# Altium PCB Main_Board.PcbDoc (part 1 of 14)
Units mm, origin at the board's own origin, x right, y up, seen from the top; angles counter-clockwise.
Board outline 142 x 82 mm, 10 copper layers (L1_Top, L2_PWR1, L3_Sig1, L4_GND1, L5_Sig2, L6_Sig3, L7_GND2, L8_Sig4, L9_GND3, L8_Bottom), stack 1.71 mm thick; 299 components, 328 nets, 2329 pads, 2908 vias.
Unrouted connection lines stored in the file: 2.
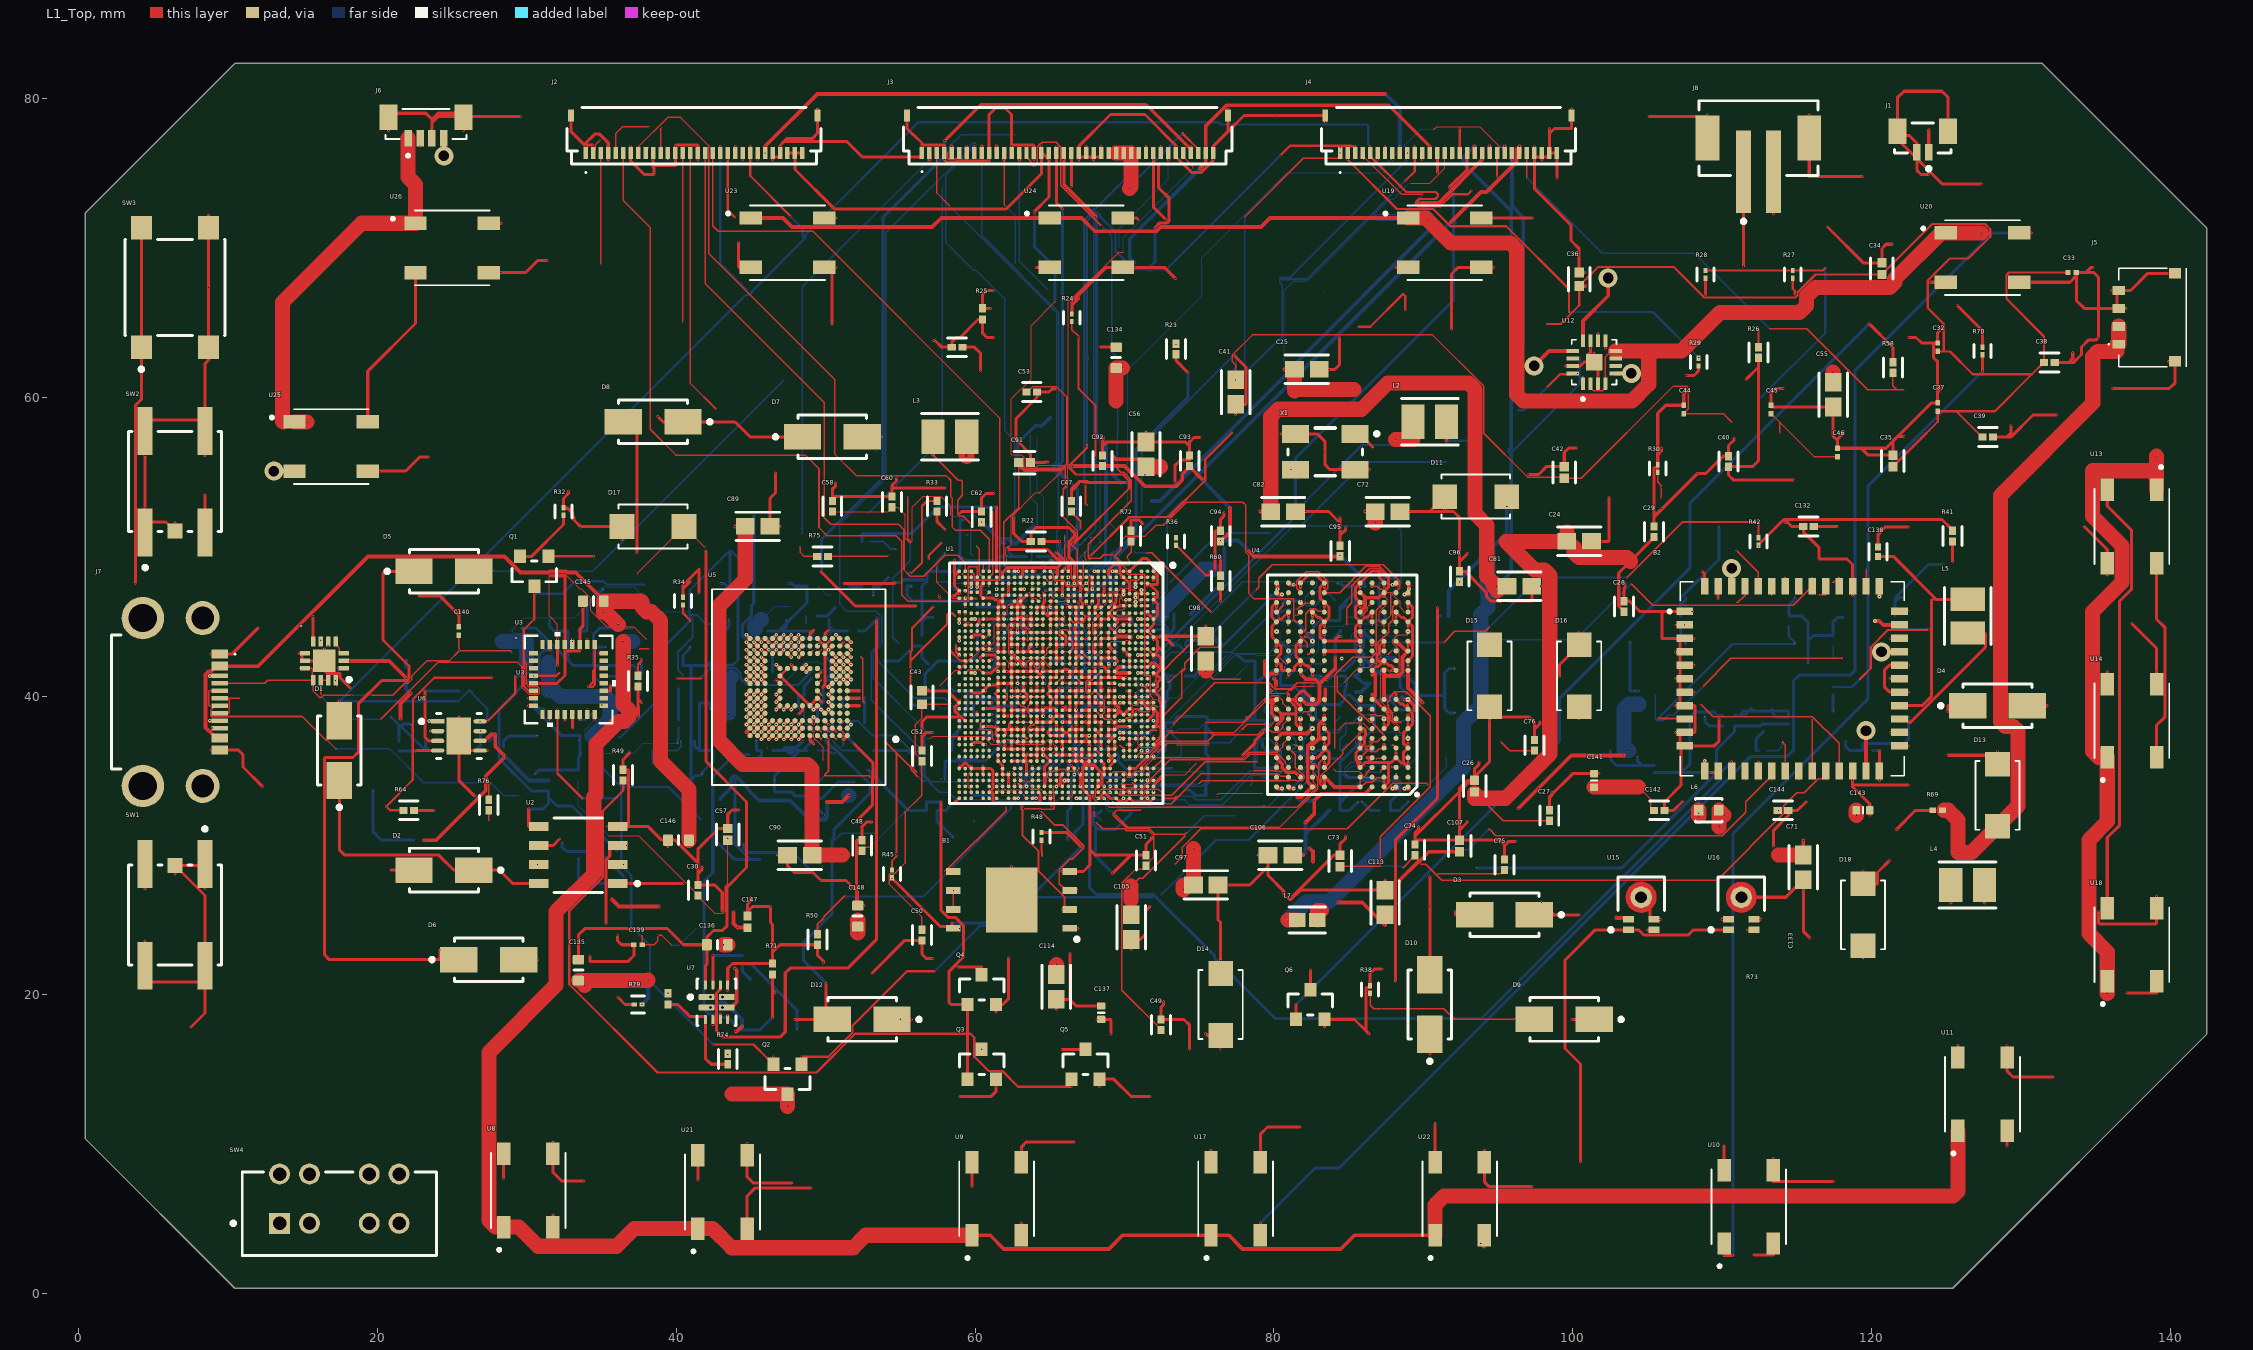
[diagram p0: L1_Top view]
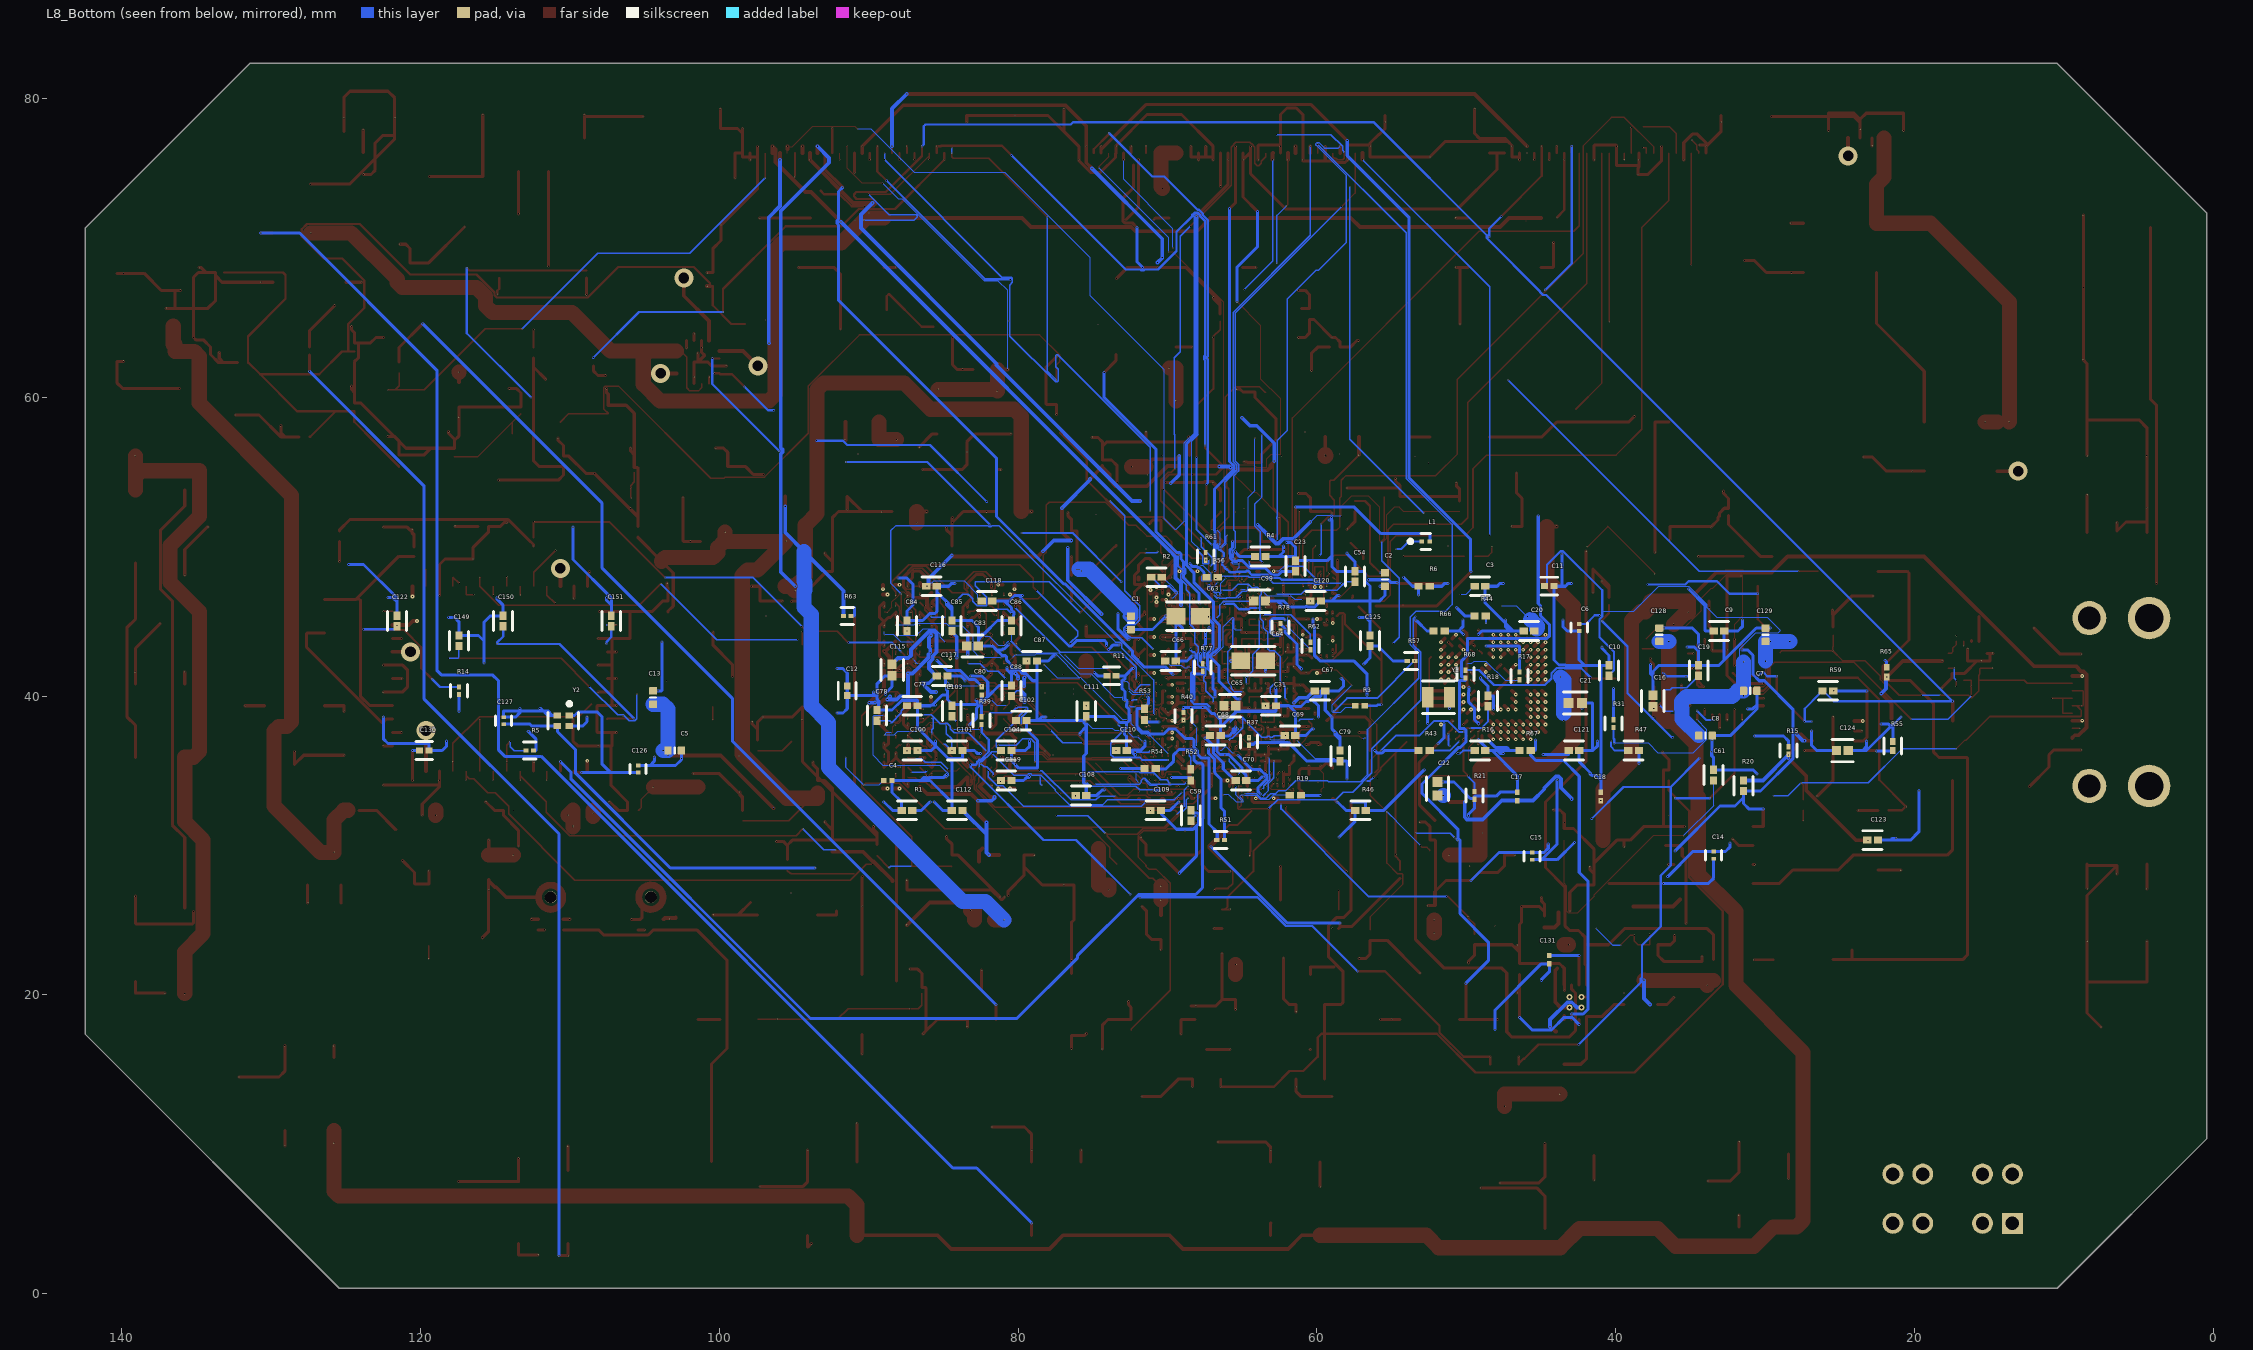
[diagram p1: L8_Bottom view, seen from below]
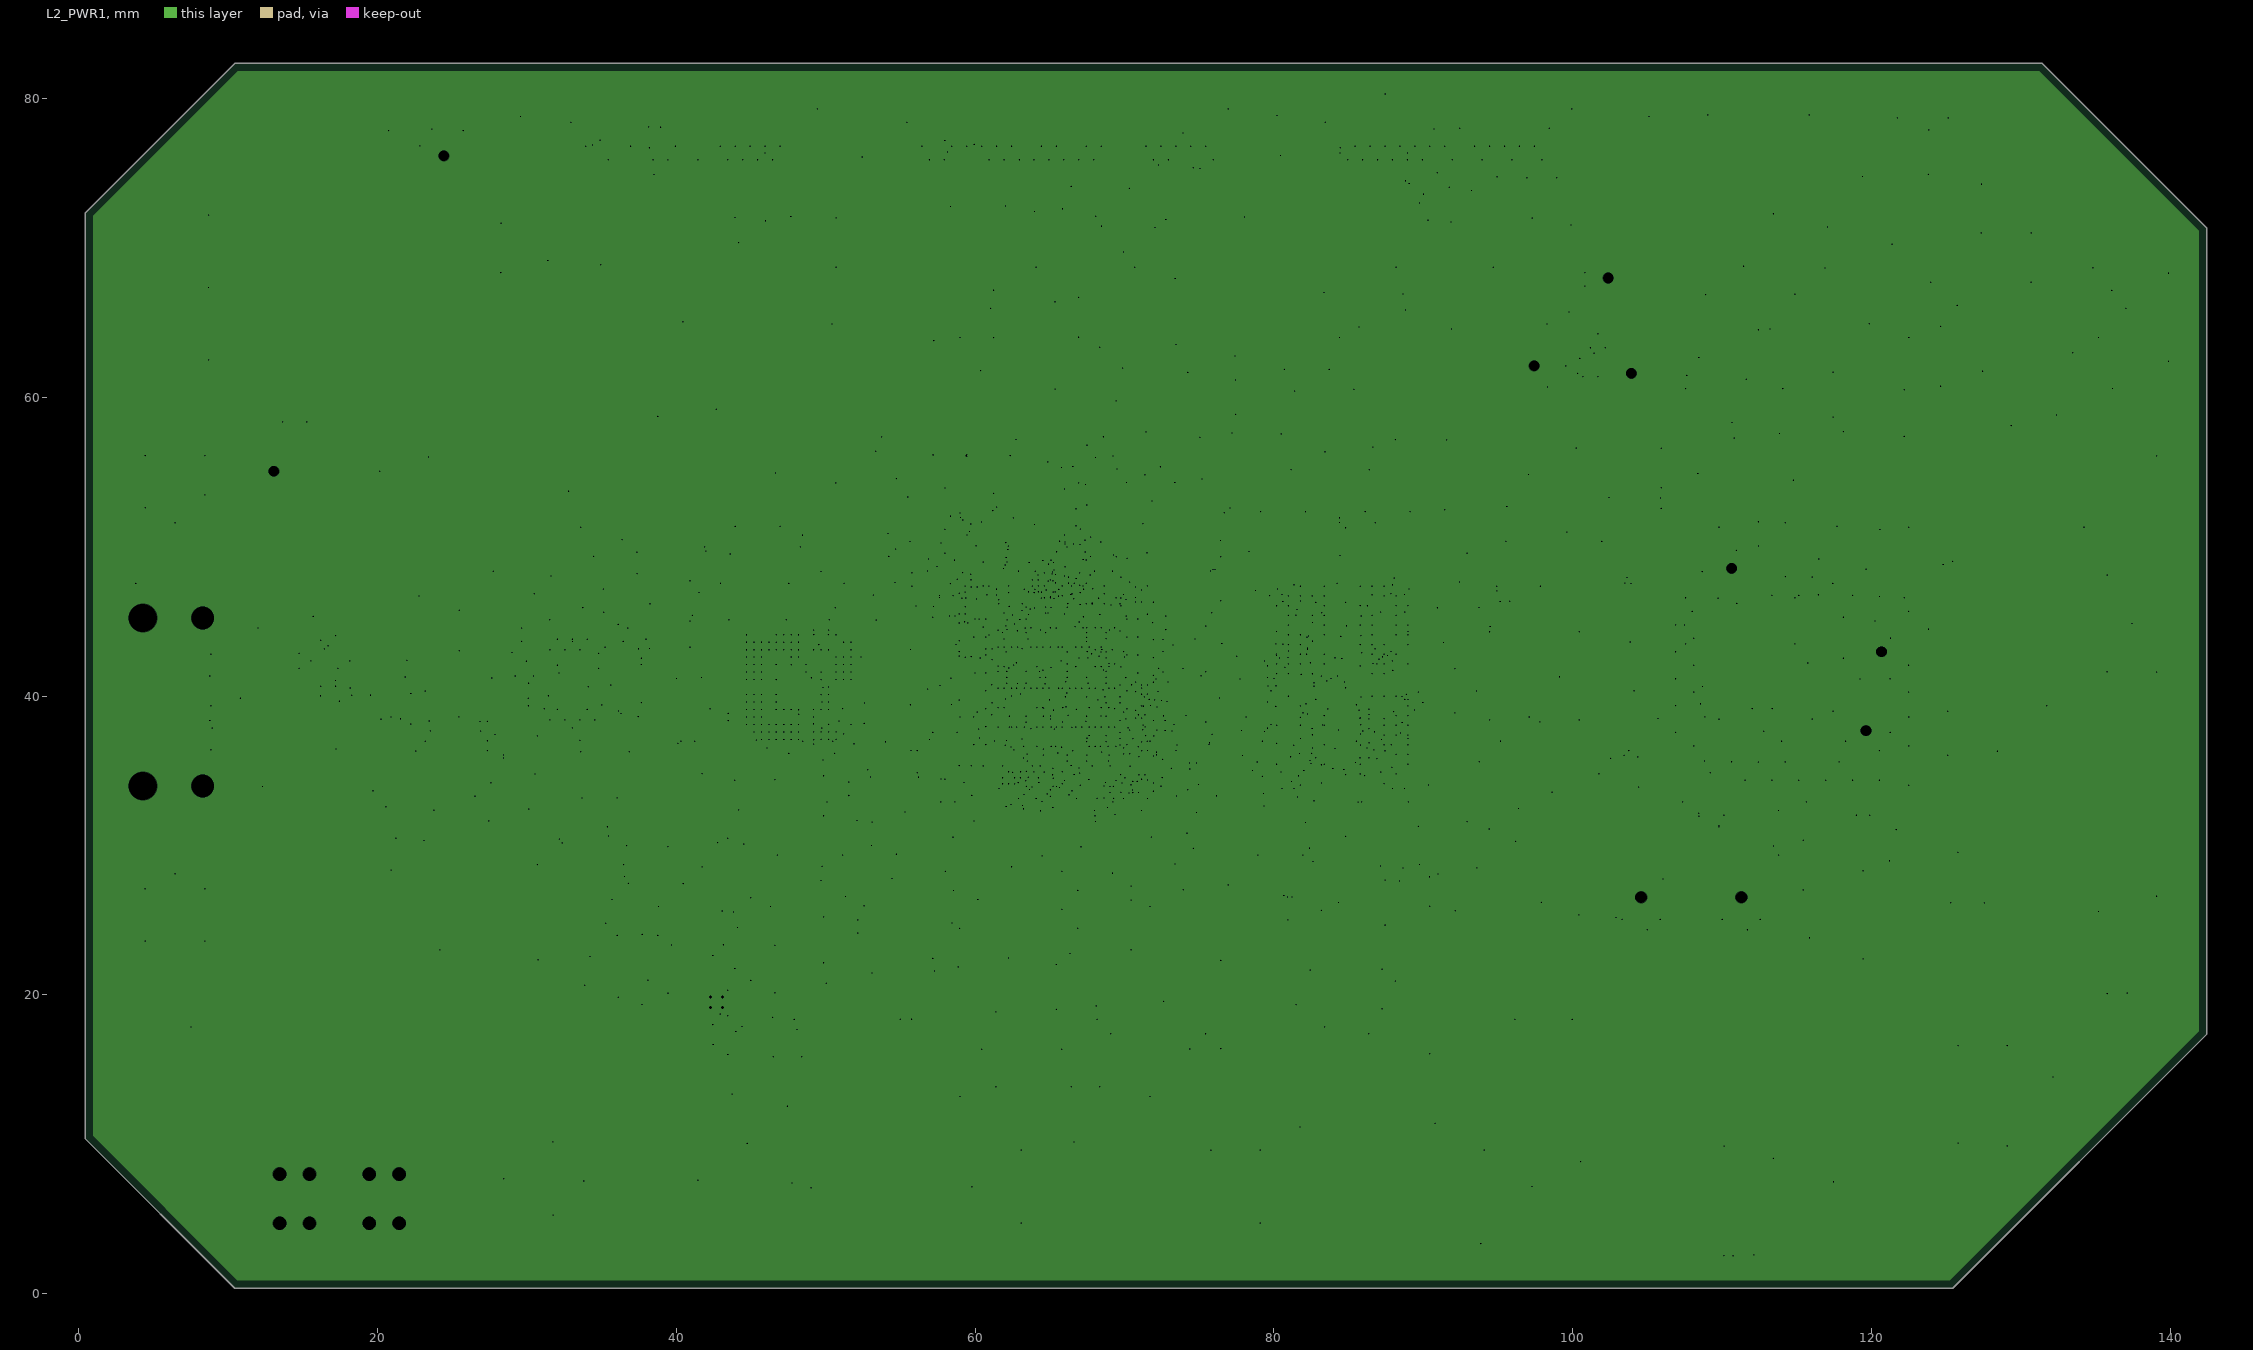
[diagram p2: L2_PWR1, clearances drawn from the general rule]
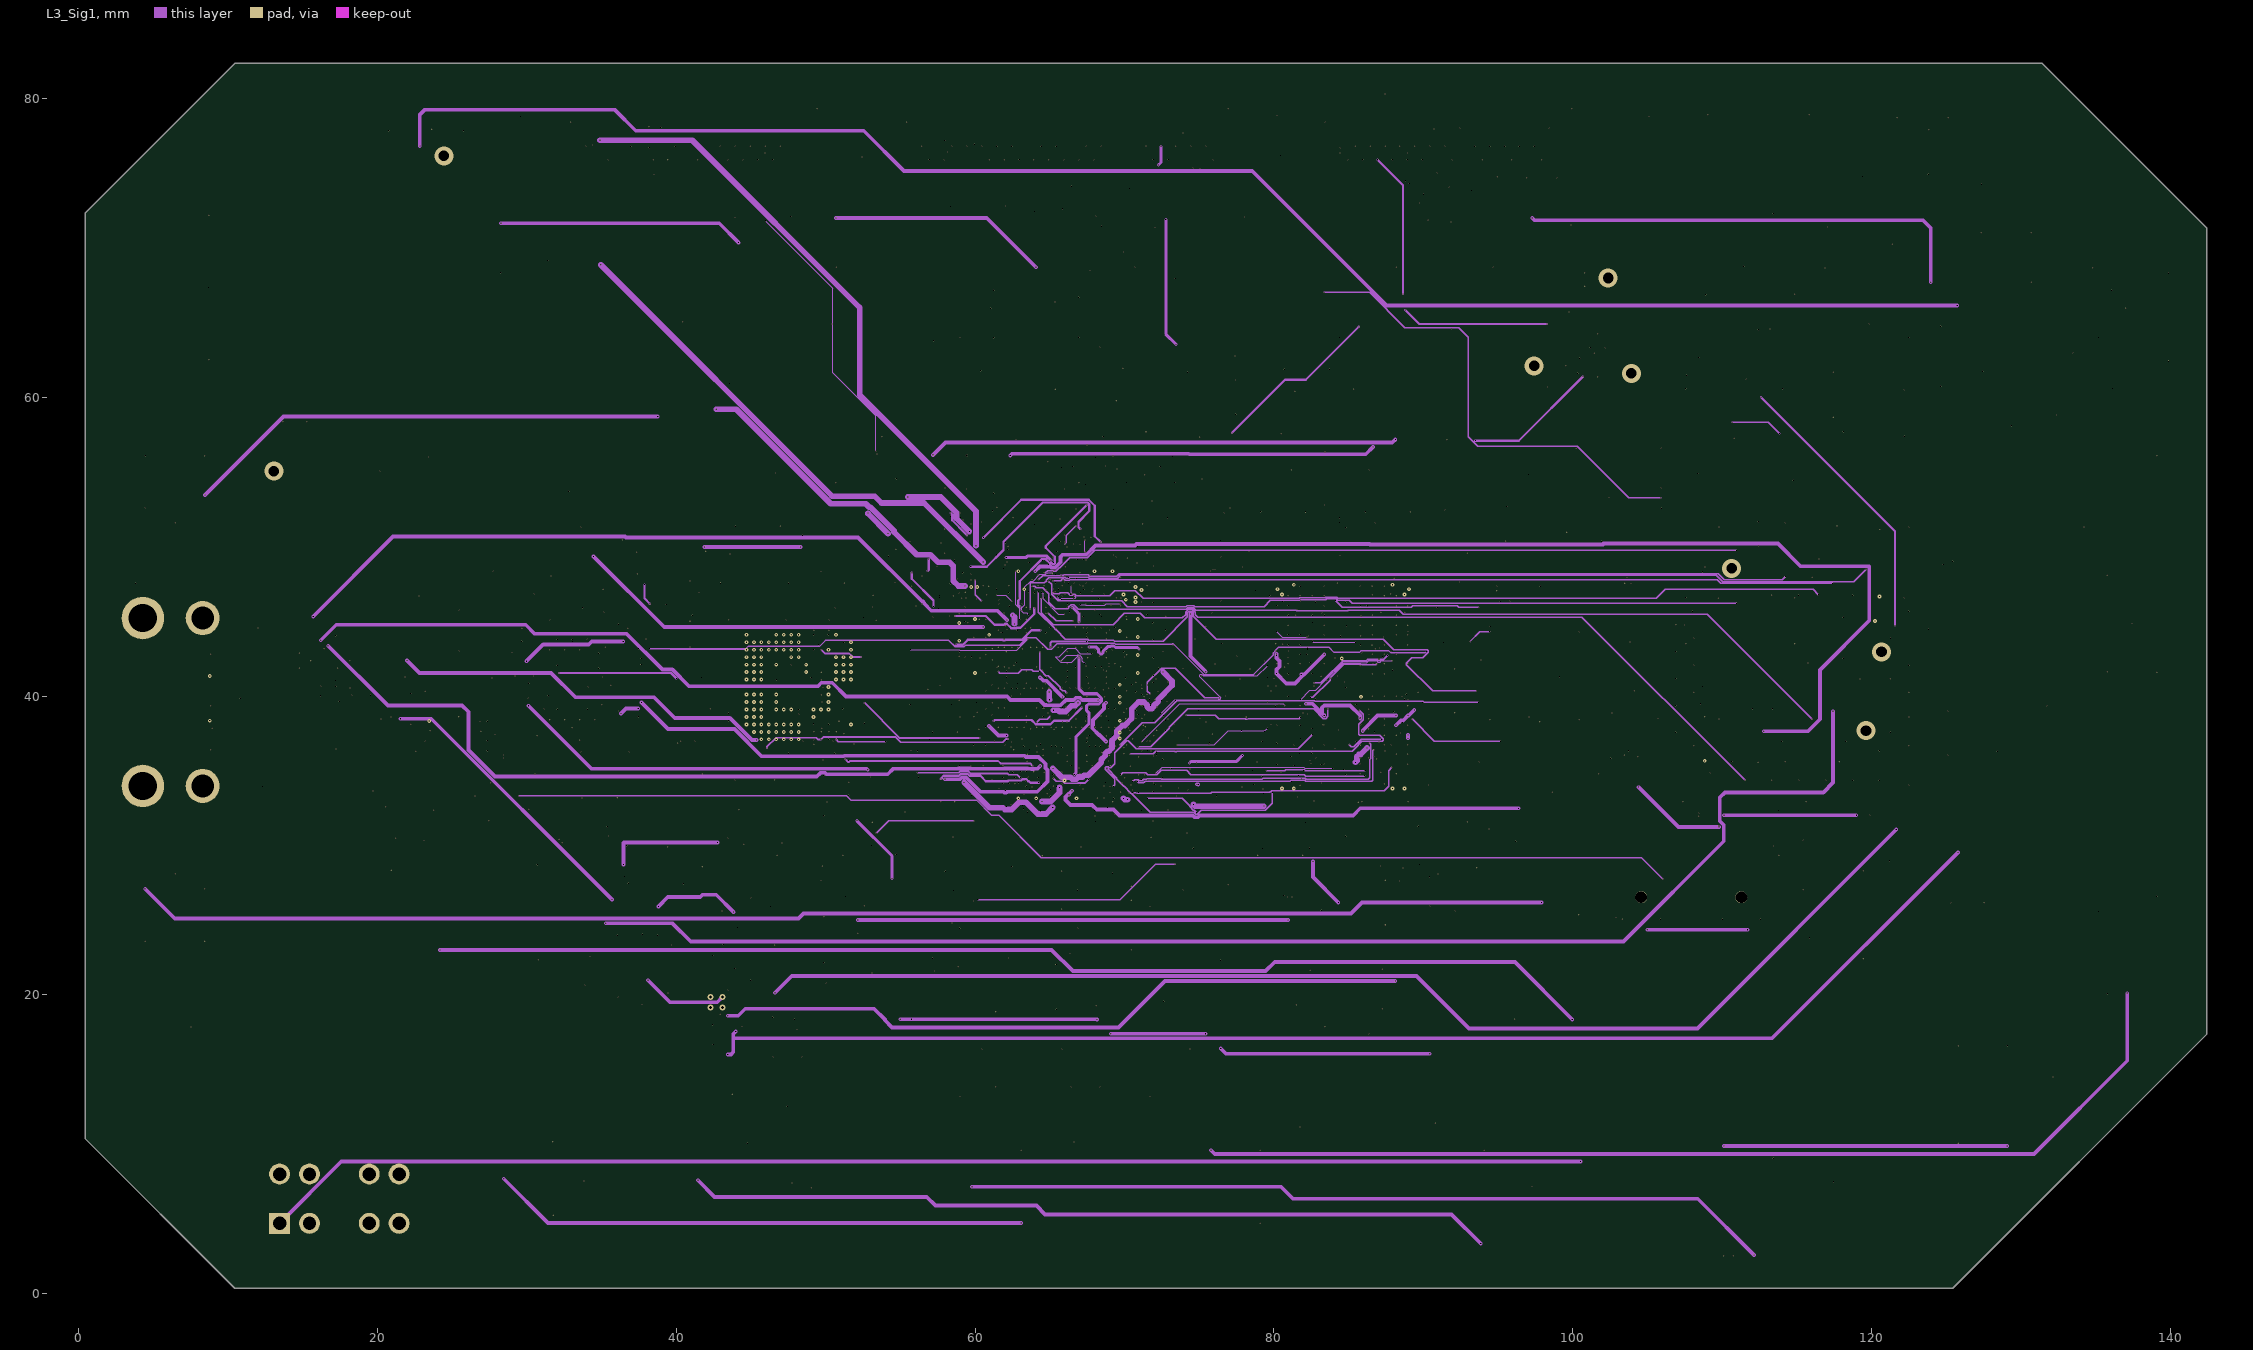
[diagram p3: L3_Sig1]
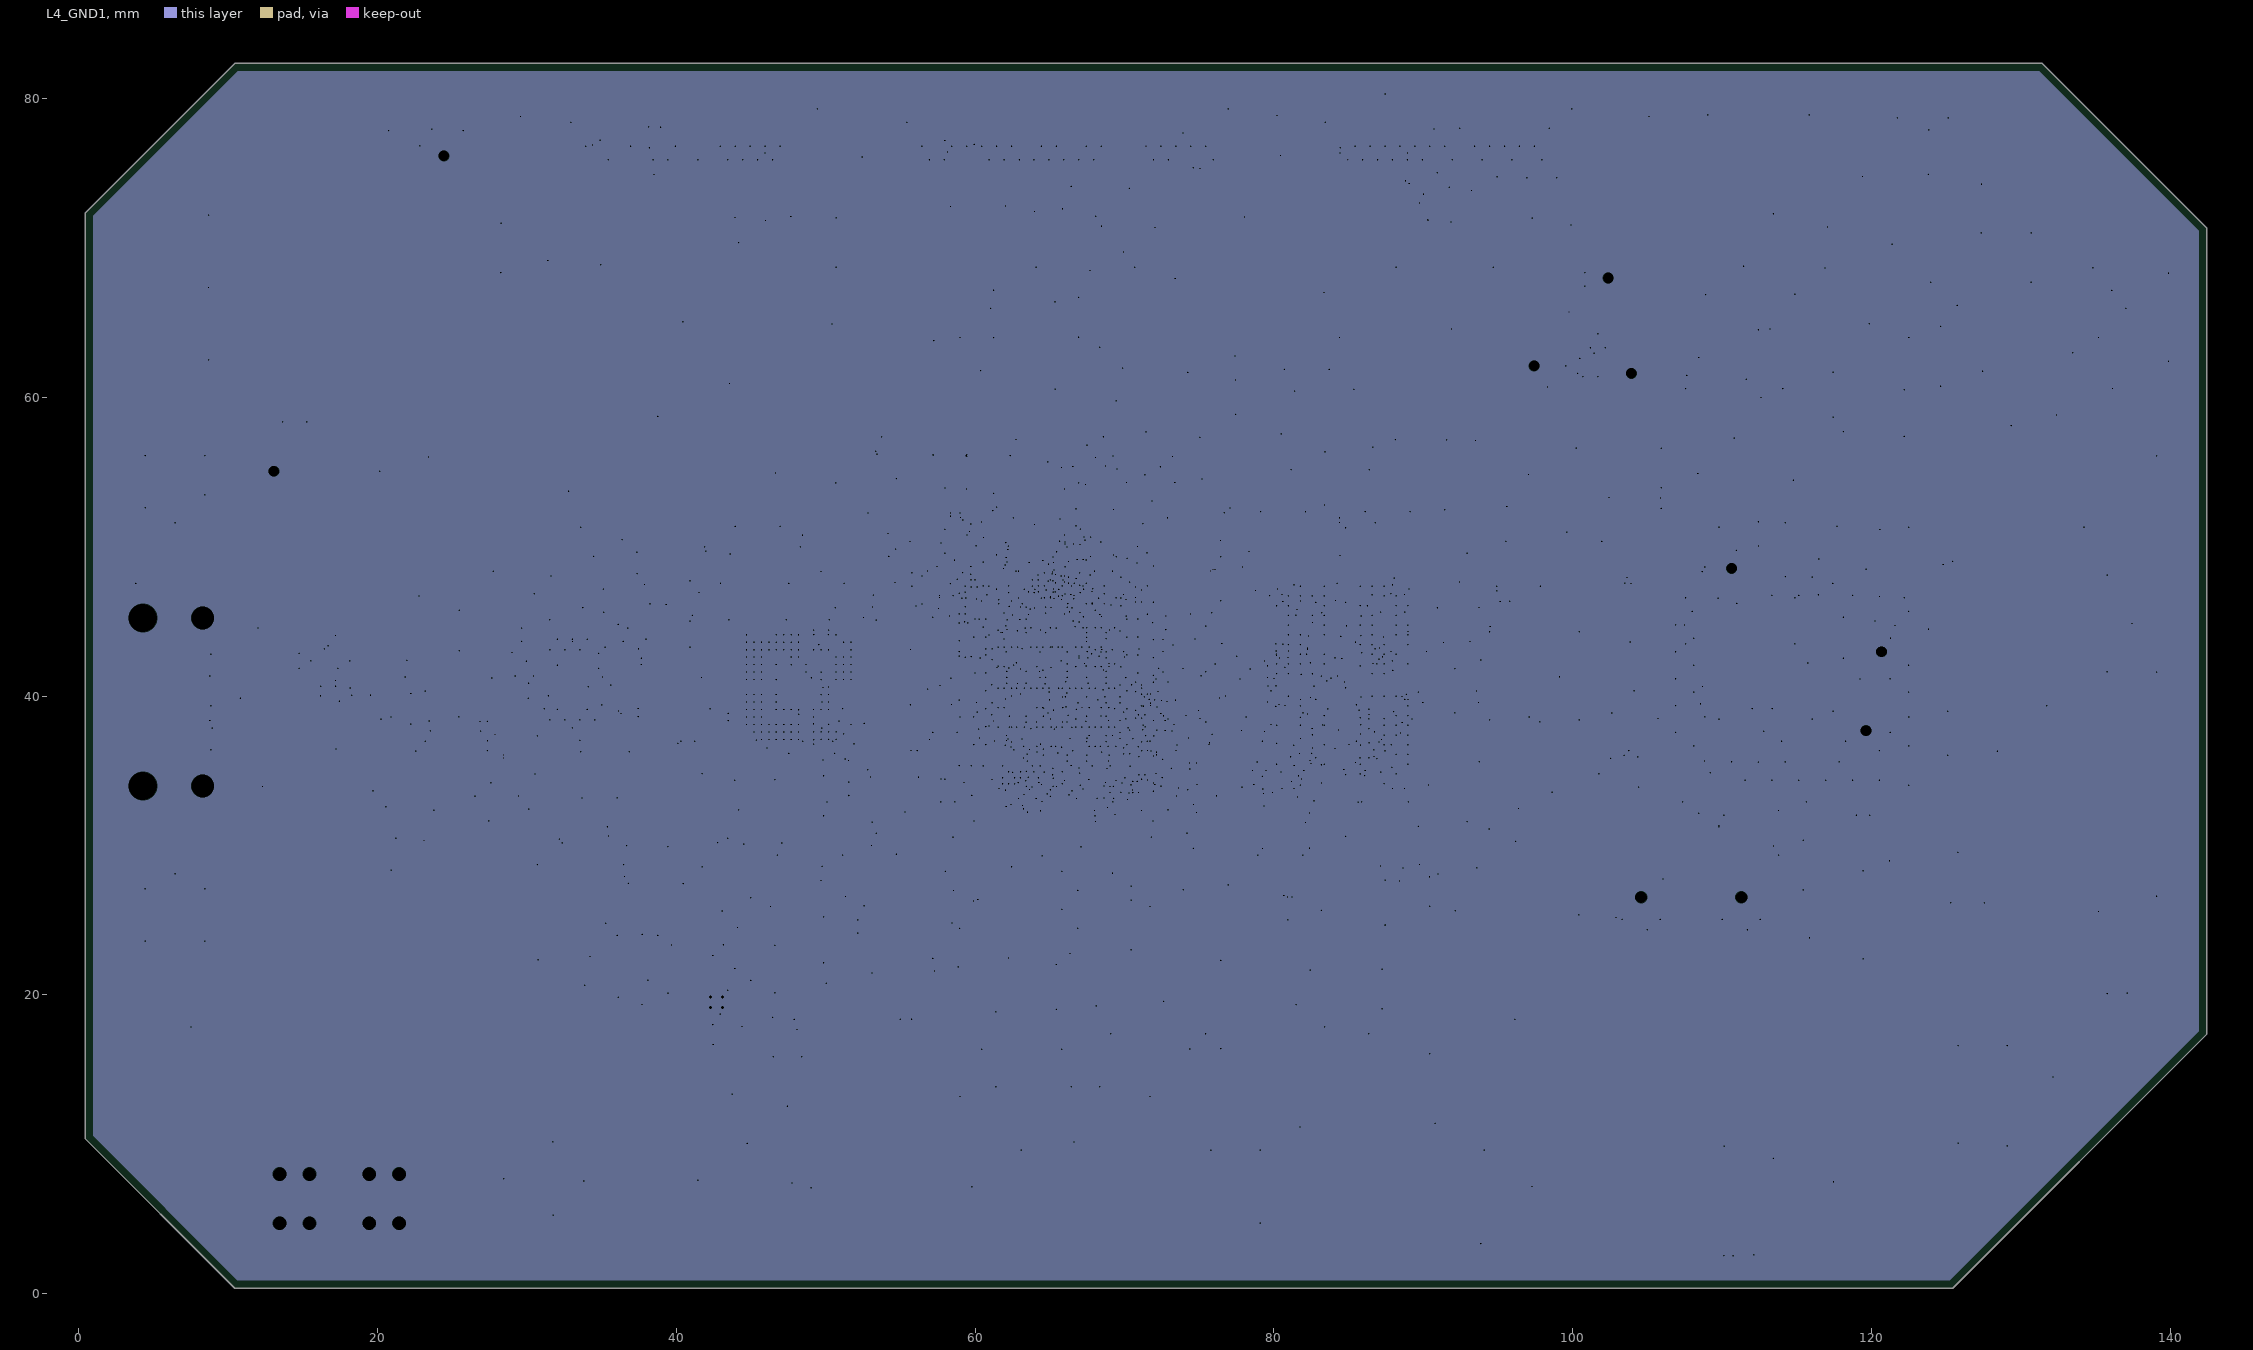
[diagram p4: L4_GND1, clearances drawn from the general rule]
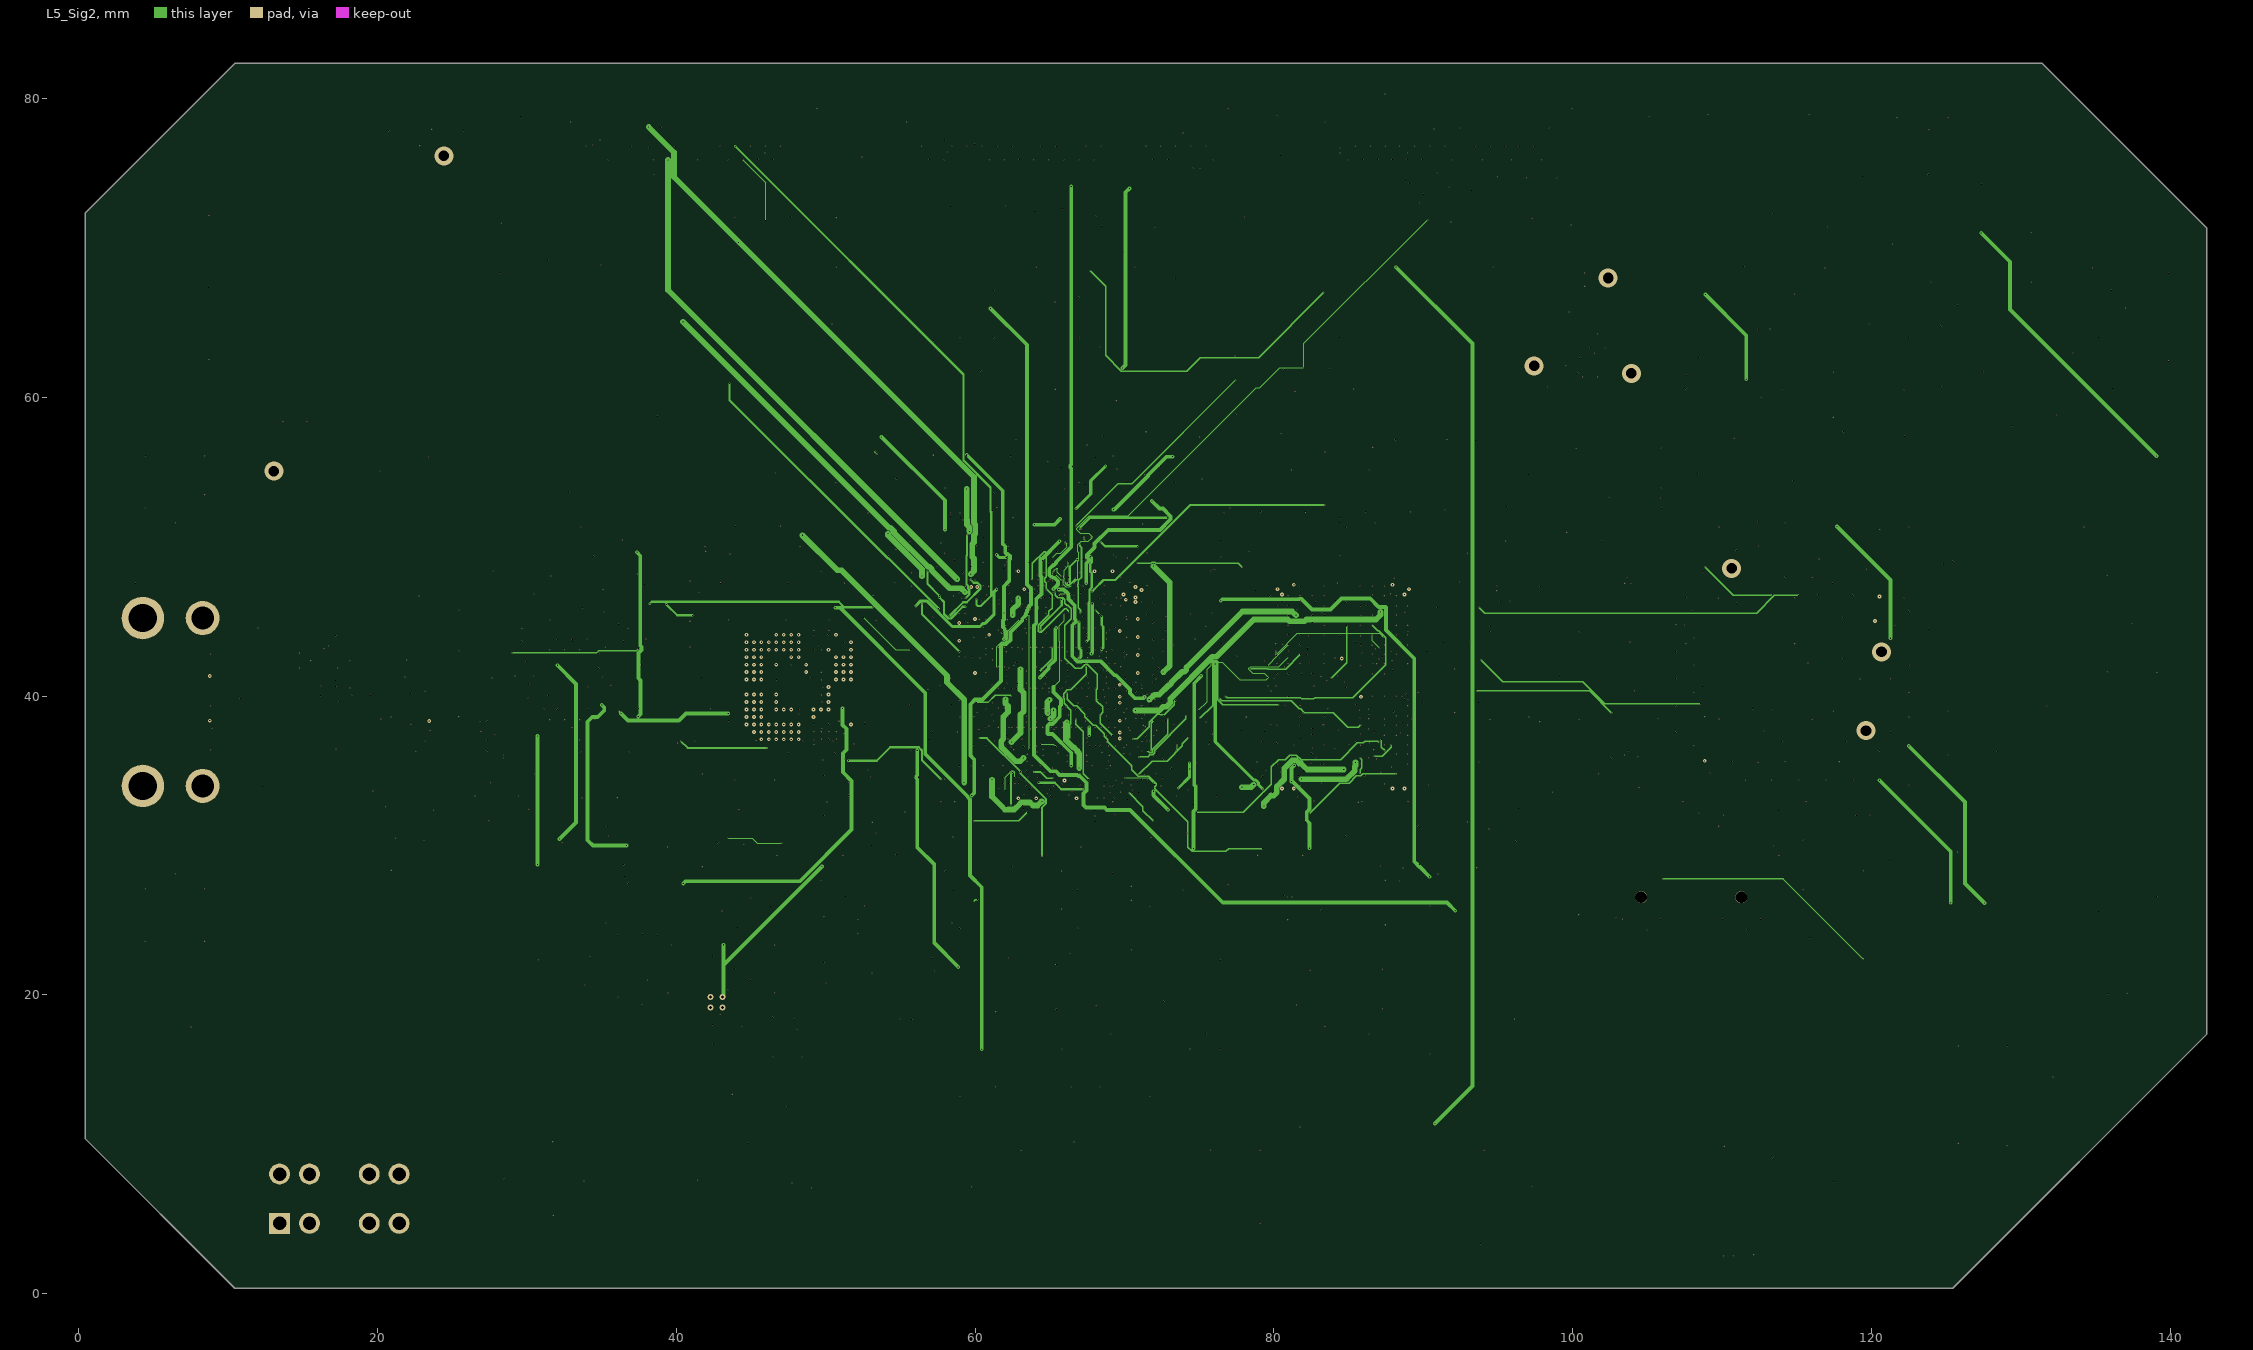
[diagram p5: L5_Sig2]
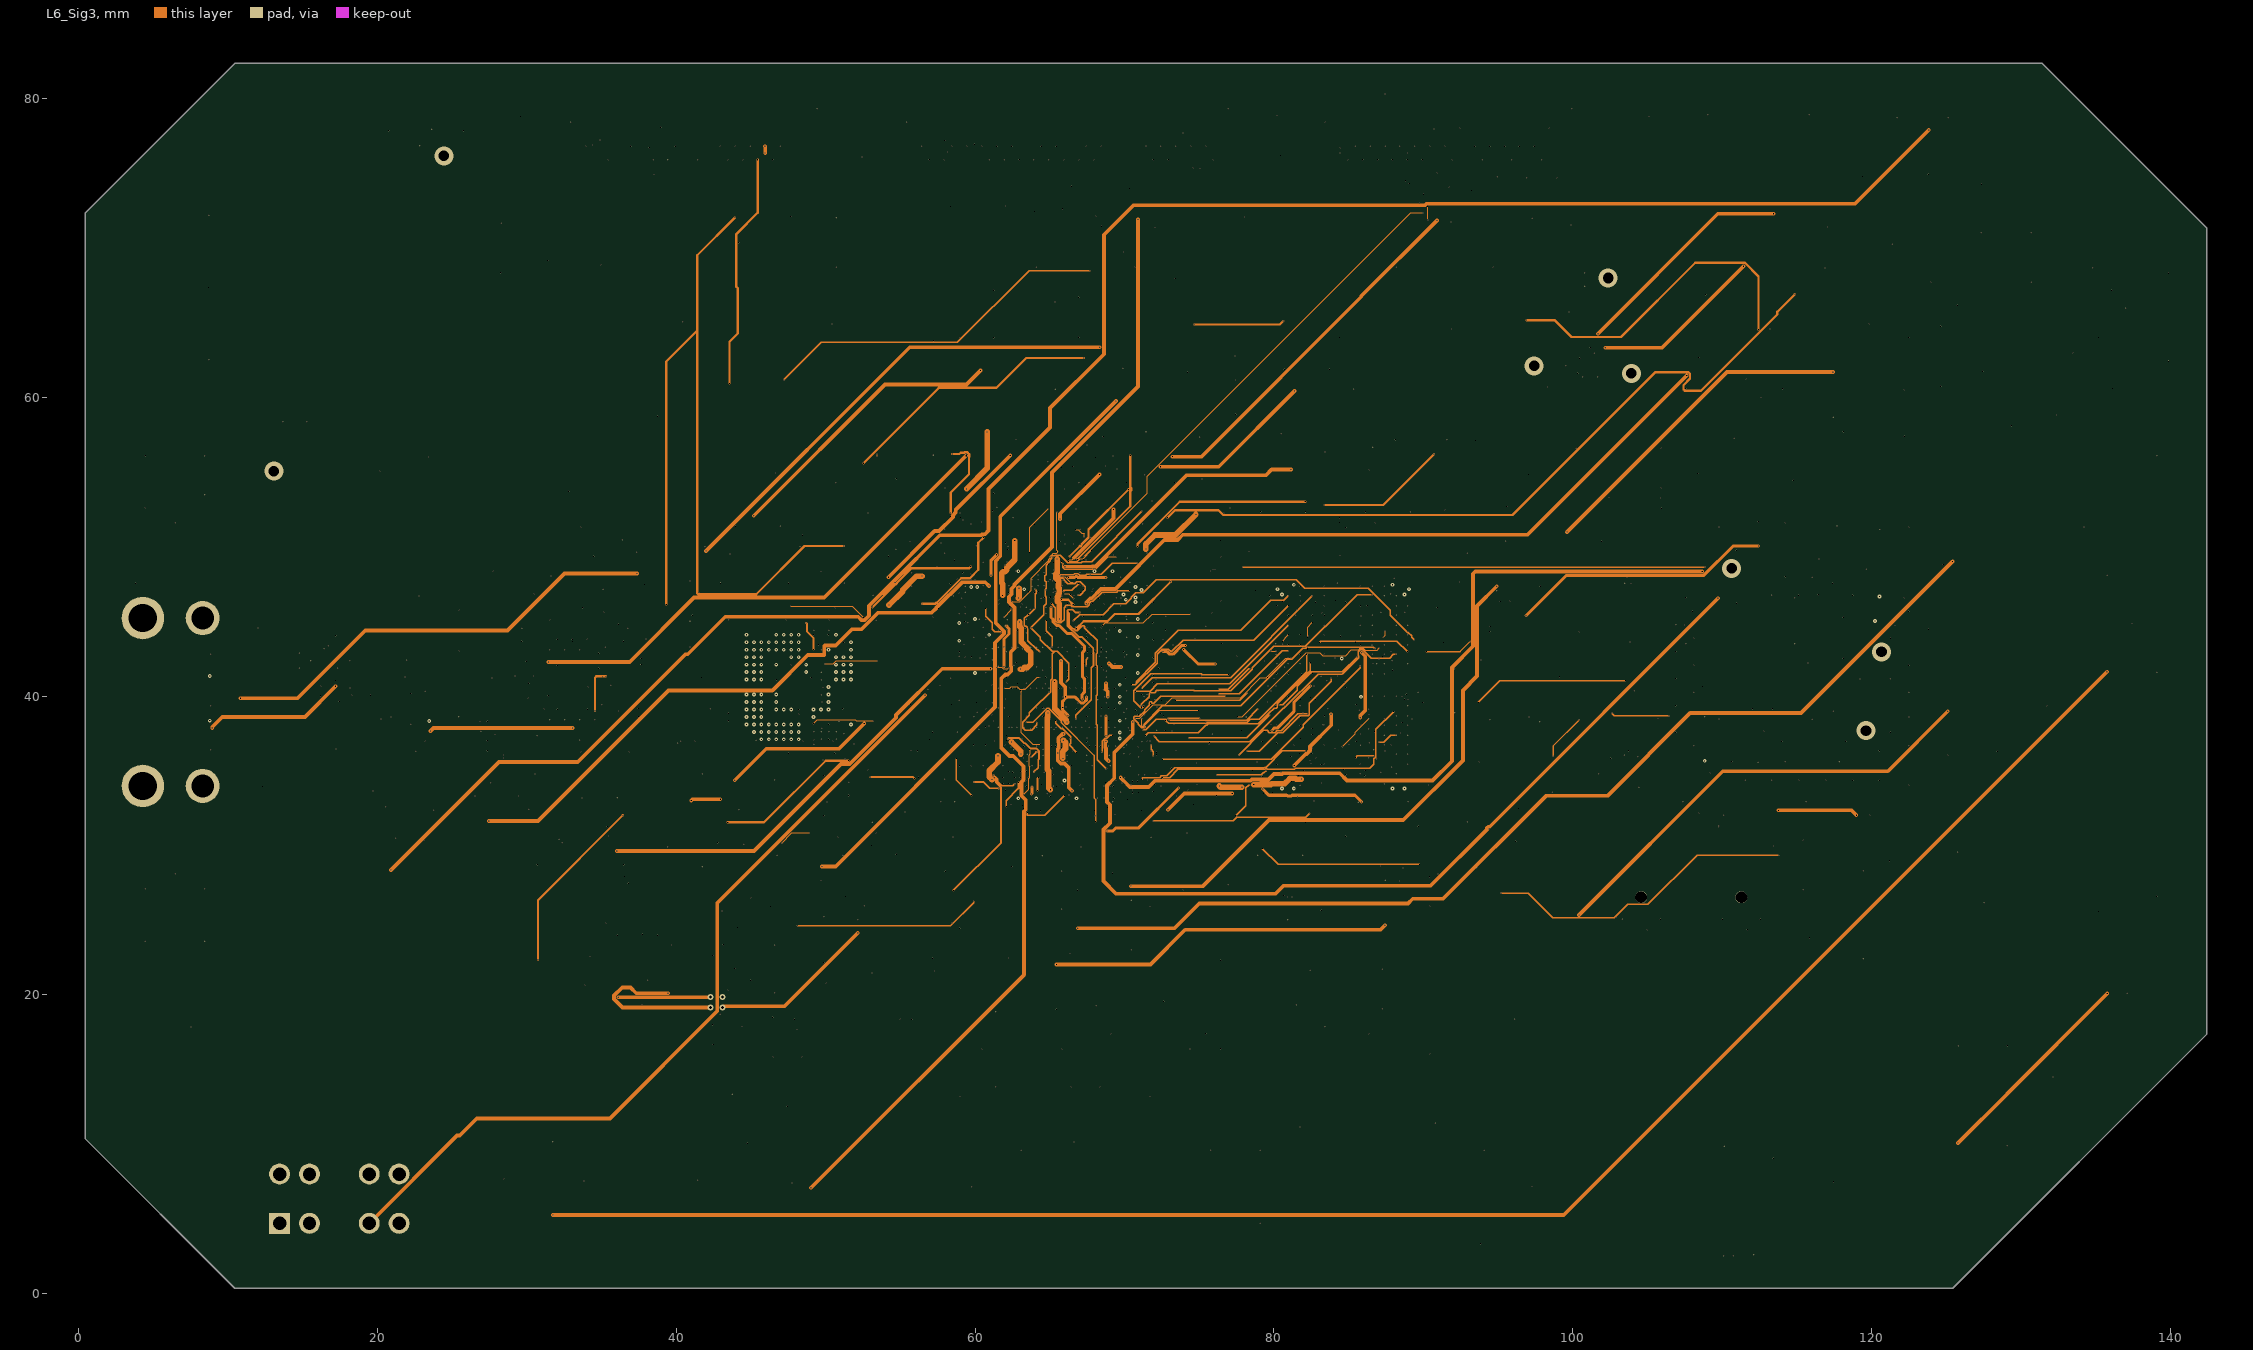
[diagram p6: L6_Sig3]
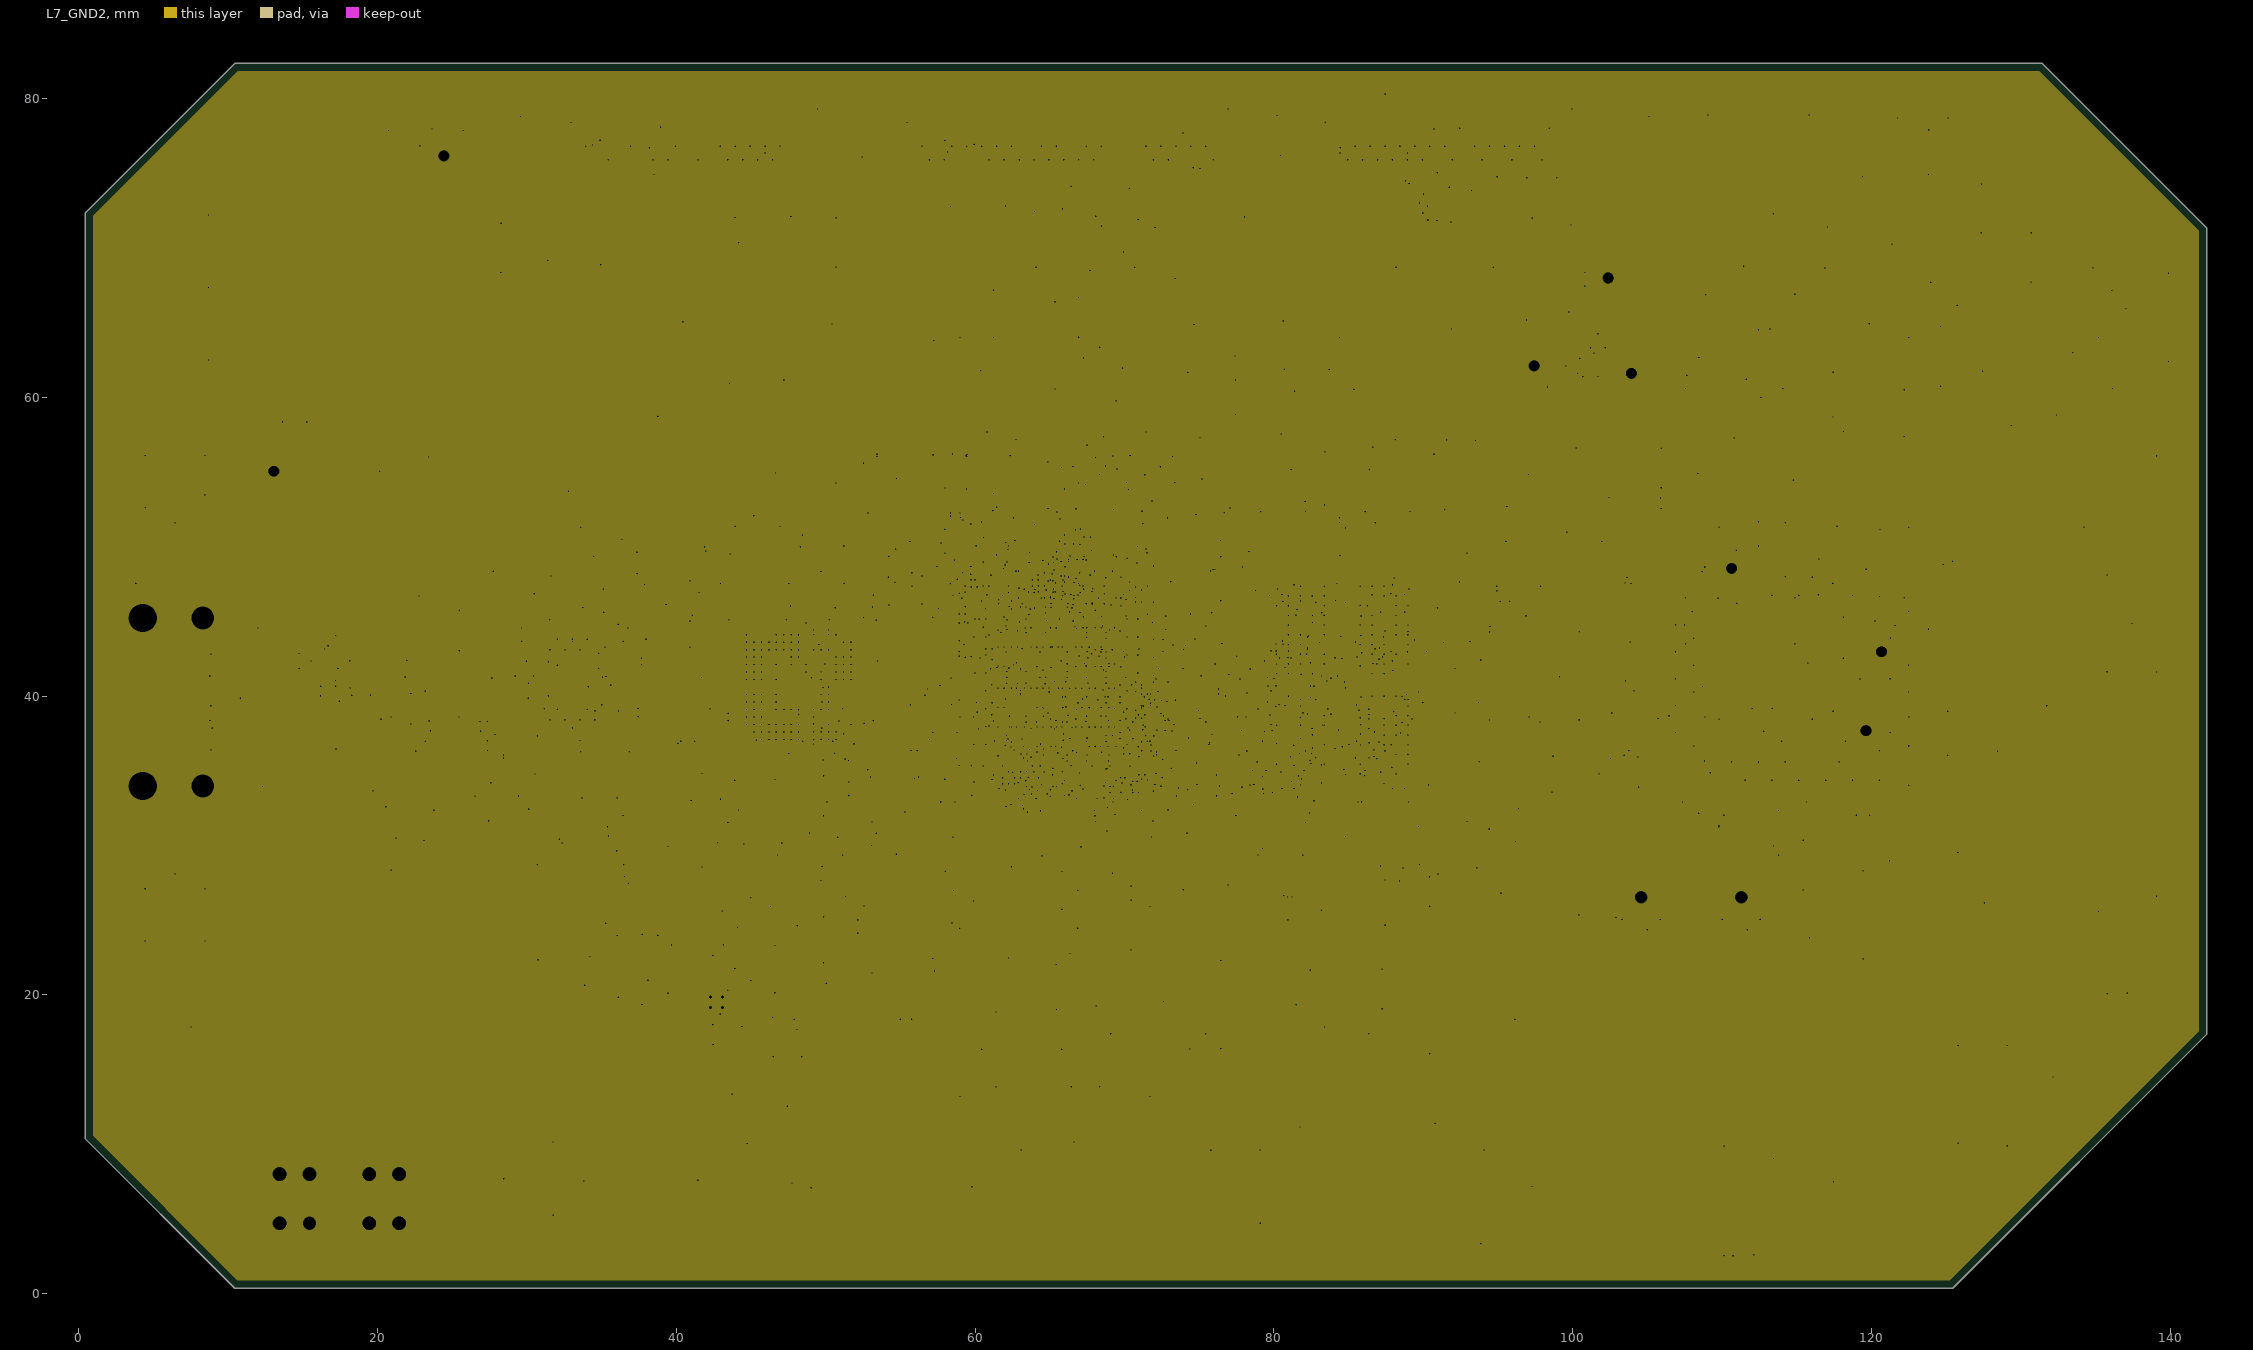
[diagram p7: L7_GND2, clearances drawn from the general rule]
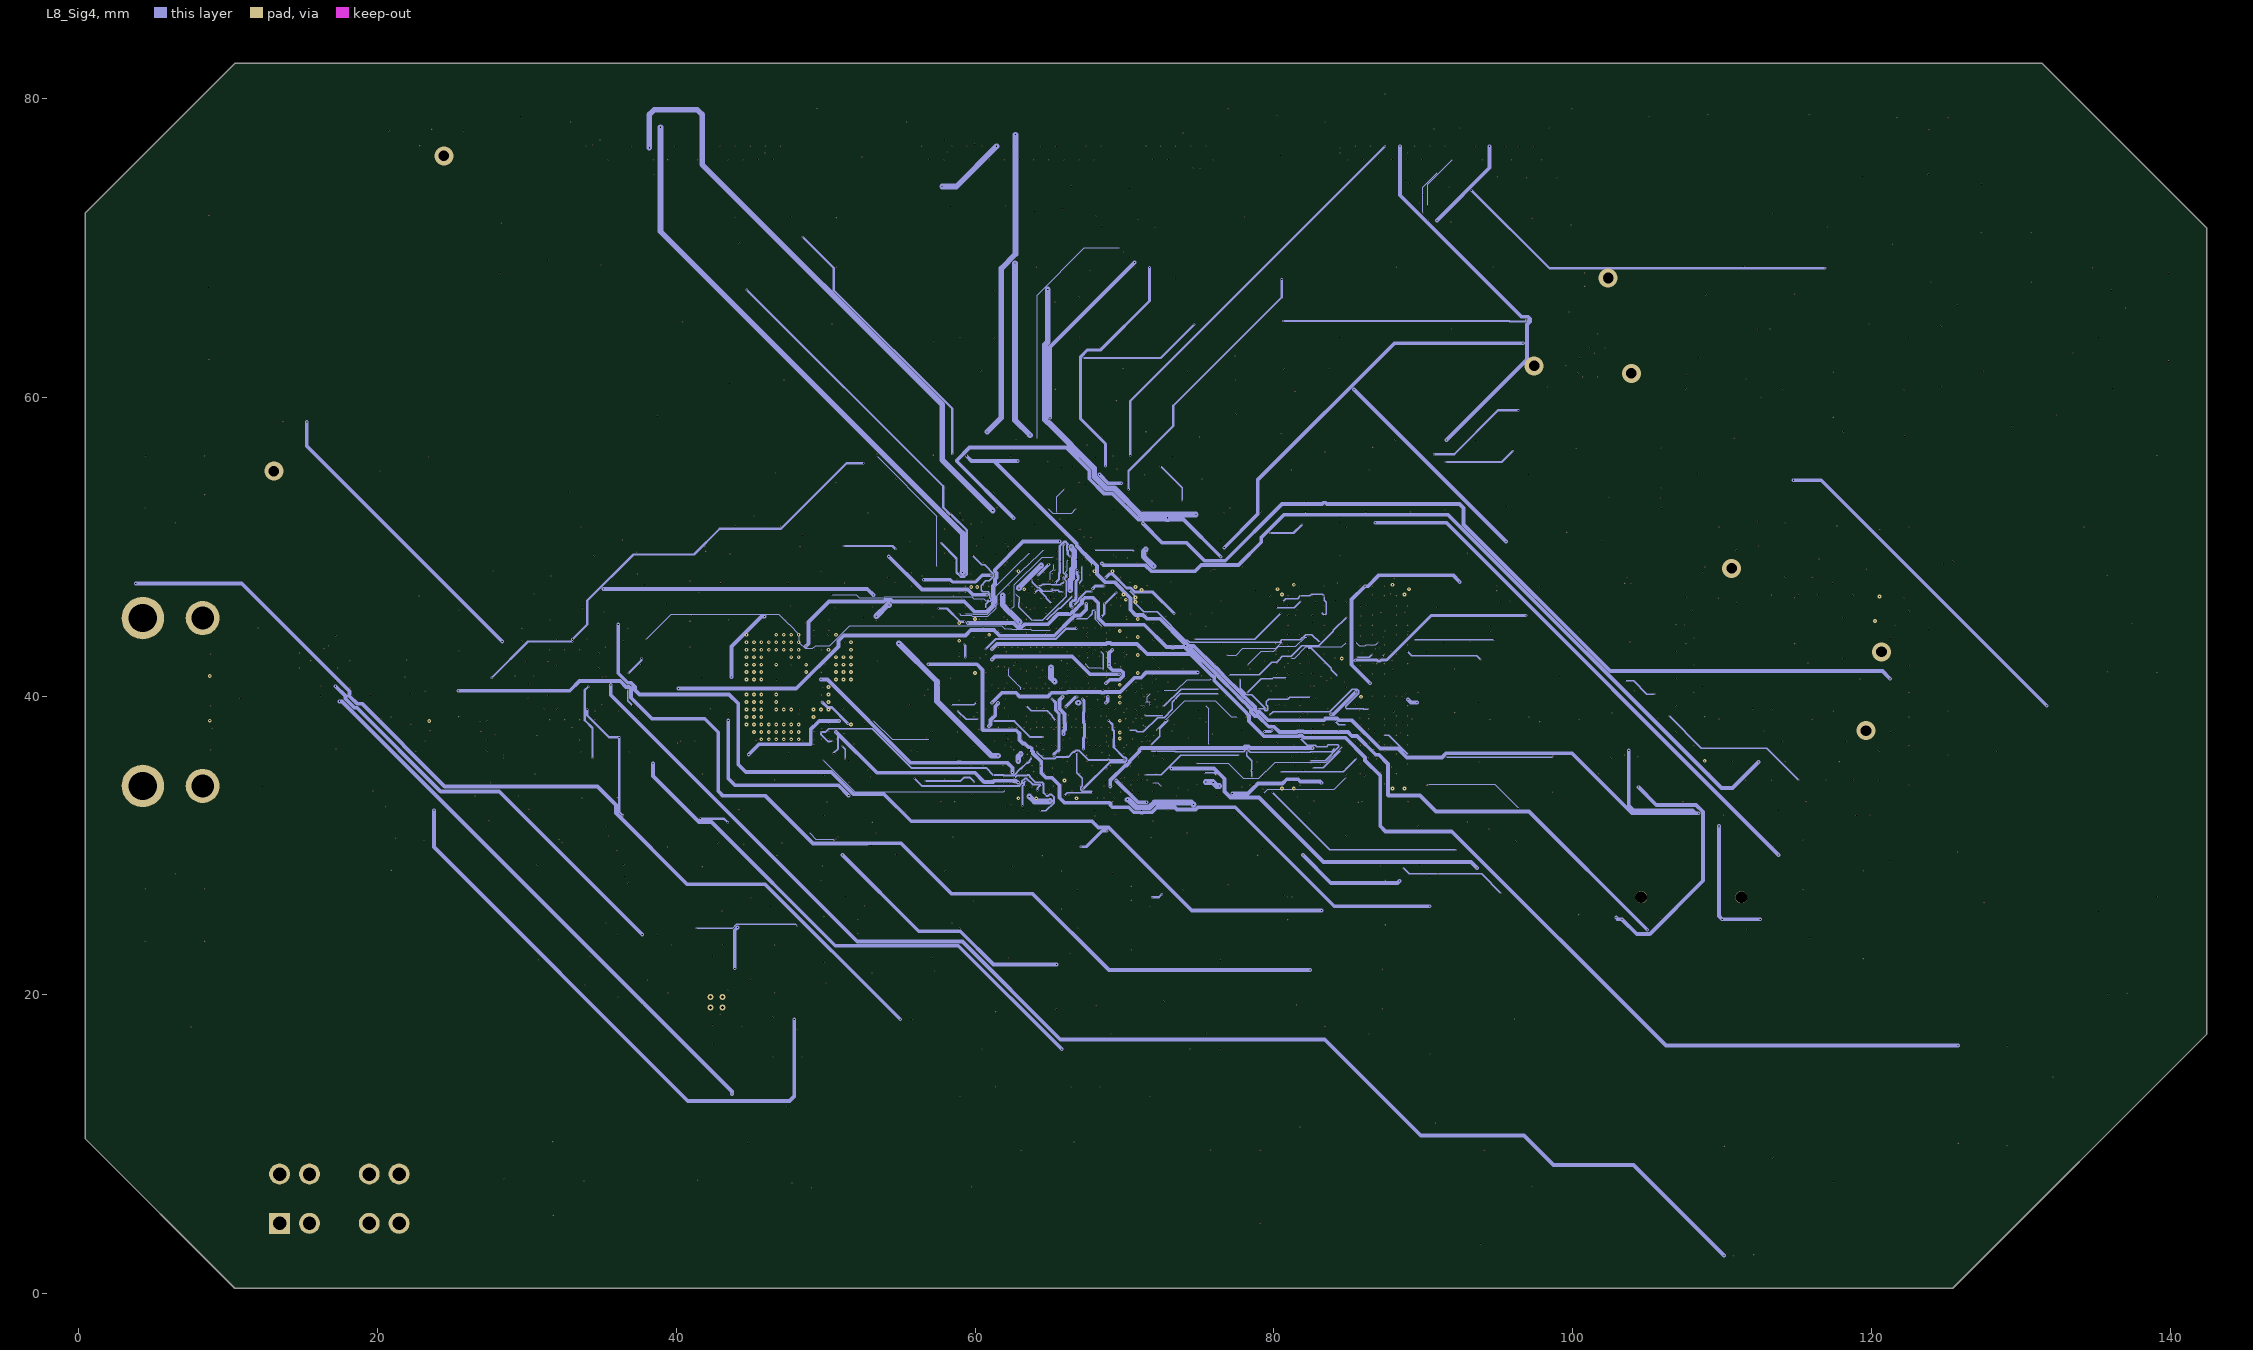
[diagram p8: L8_Sig4]
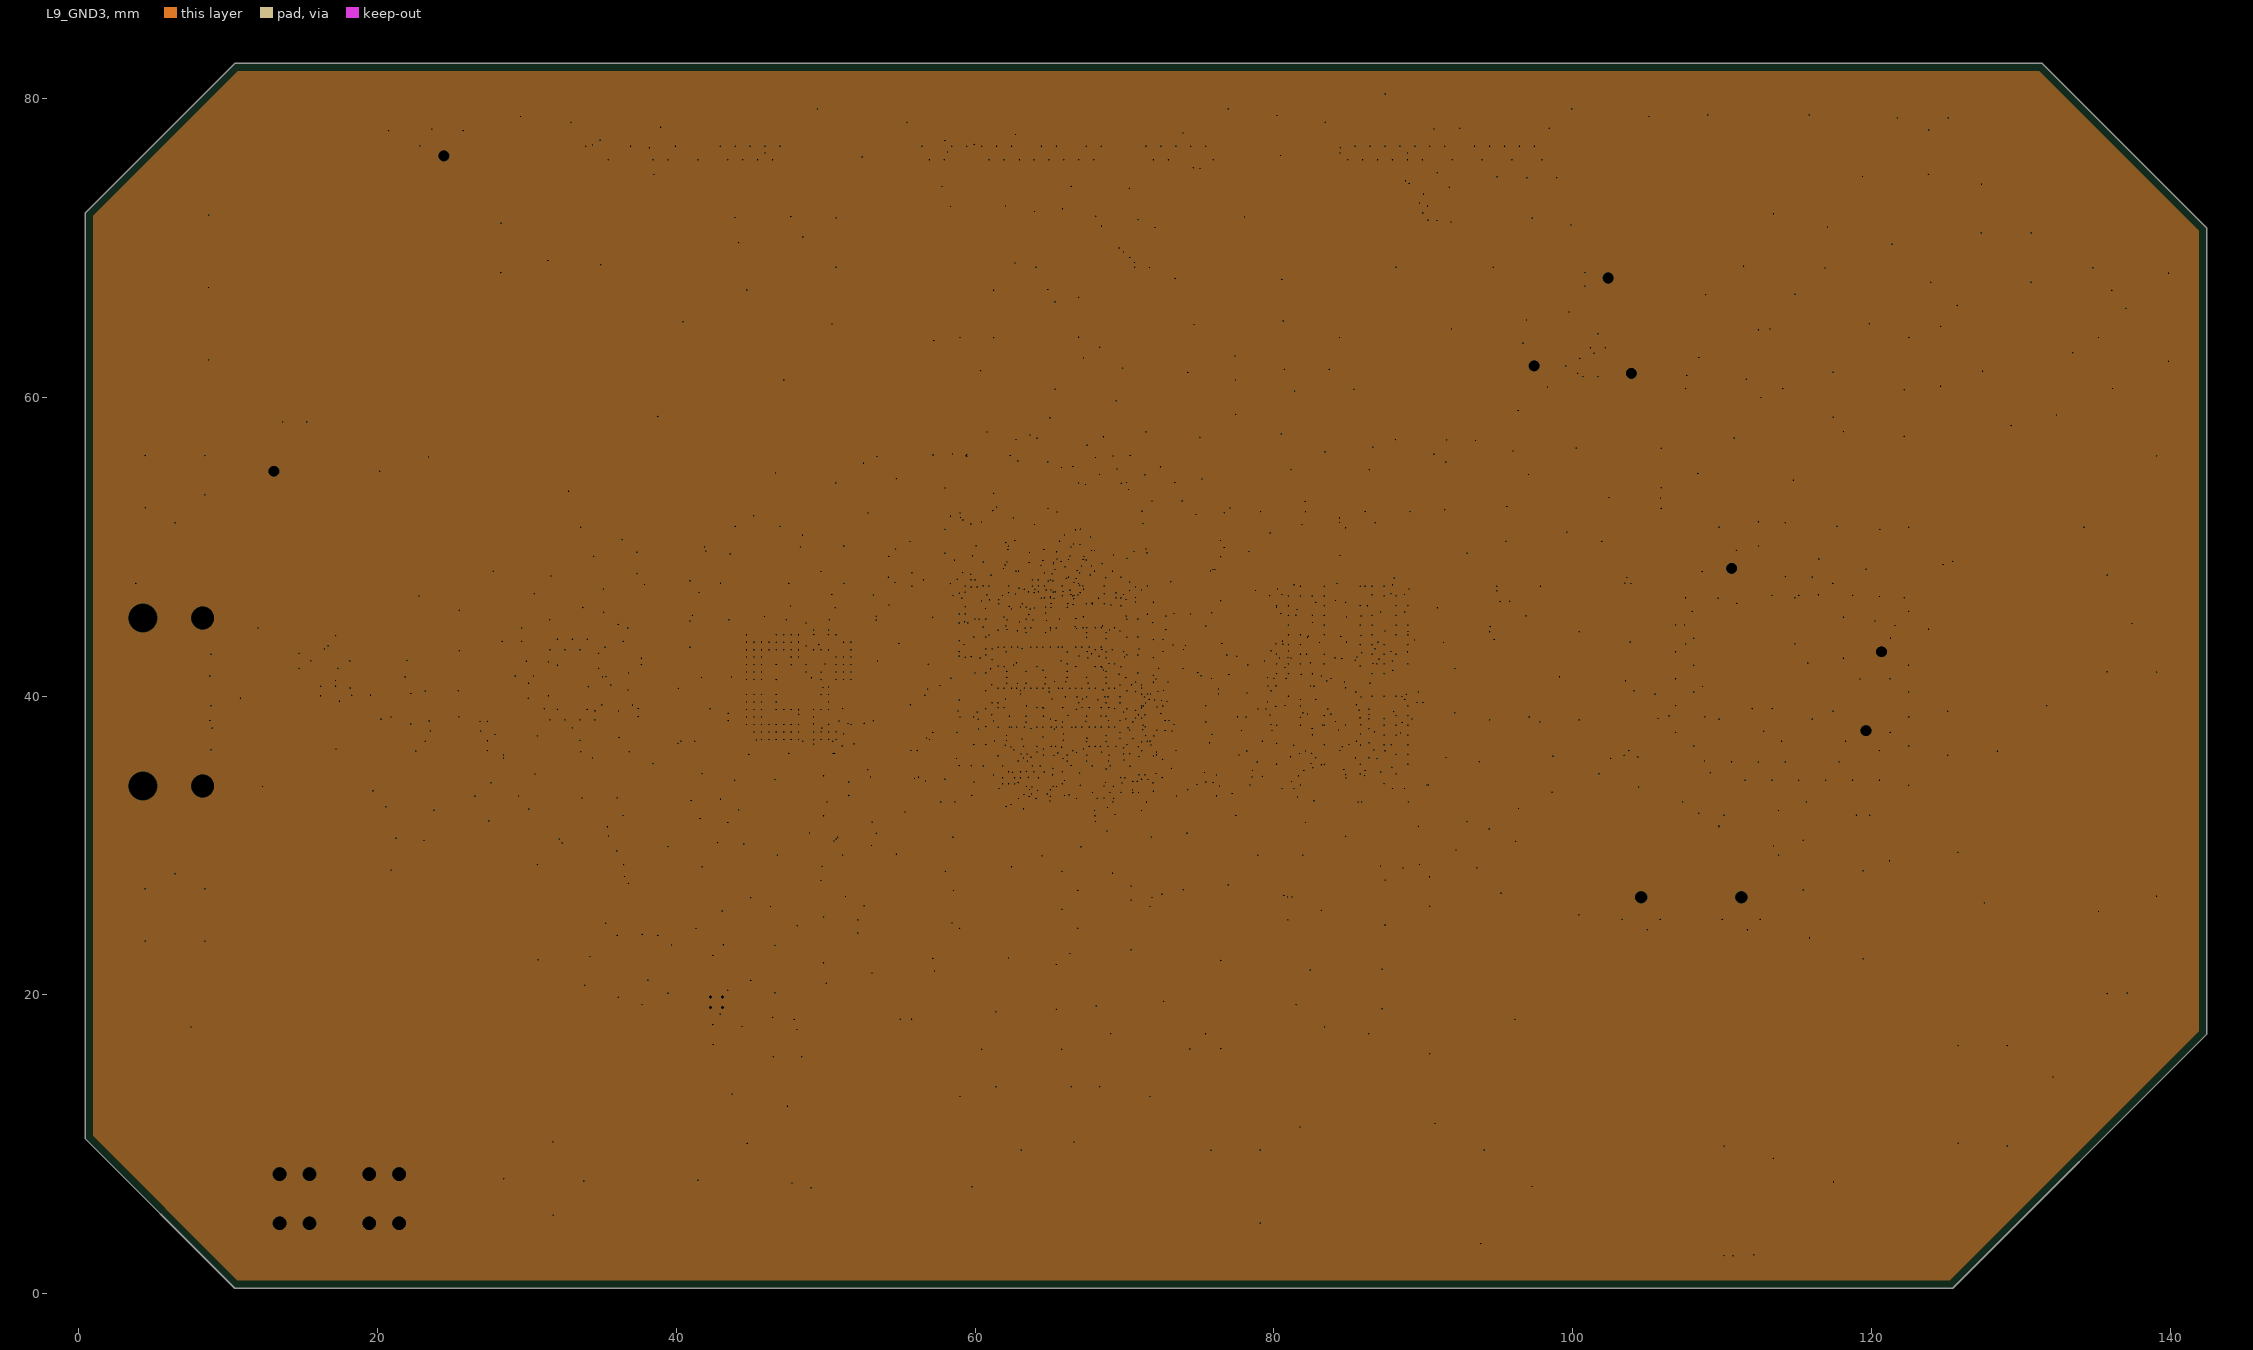
[diagram p9: L9_GND3, clearances drawn from the general rule]
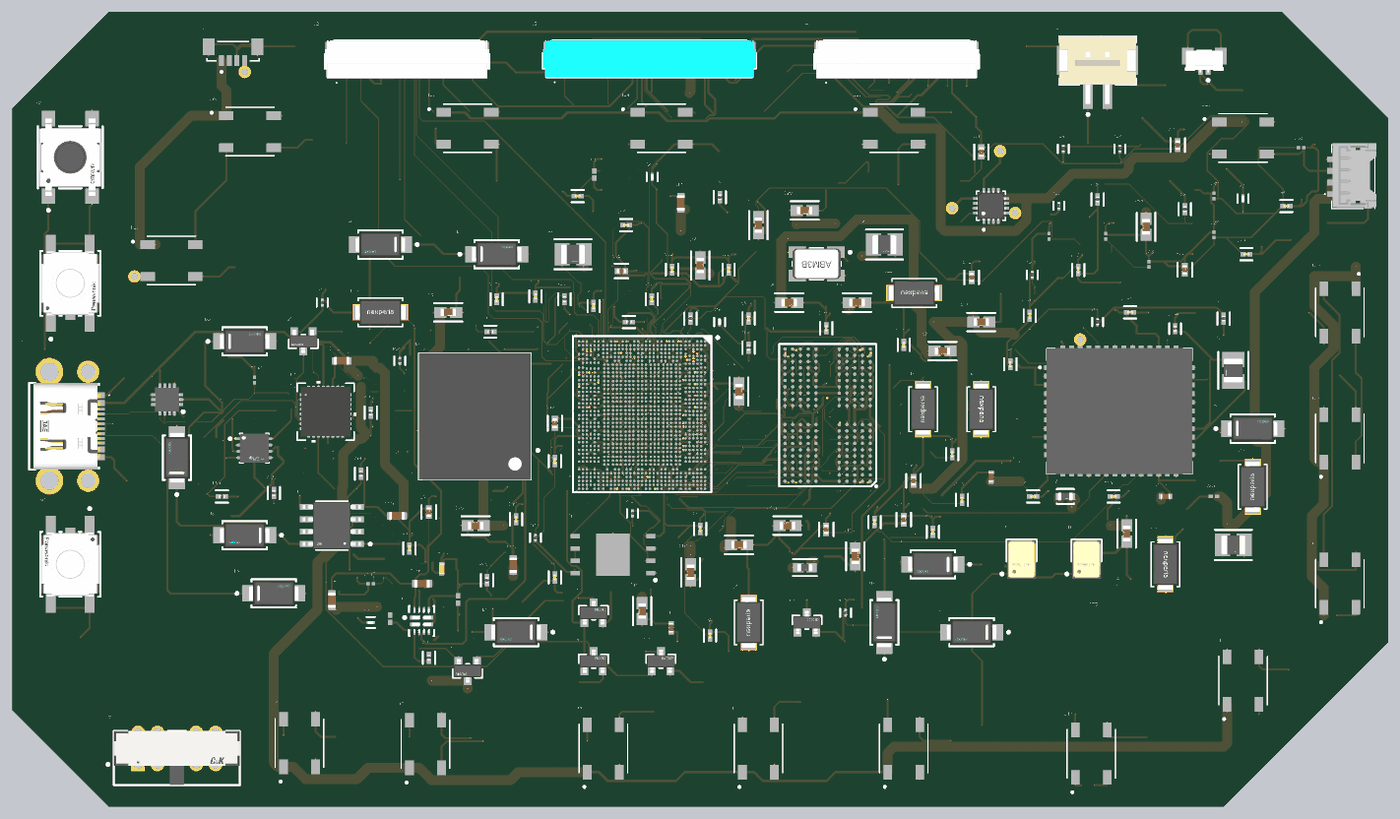
[diagram p22: 3D render of the assembled board from above, using the file's embedded part models]
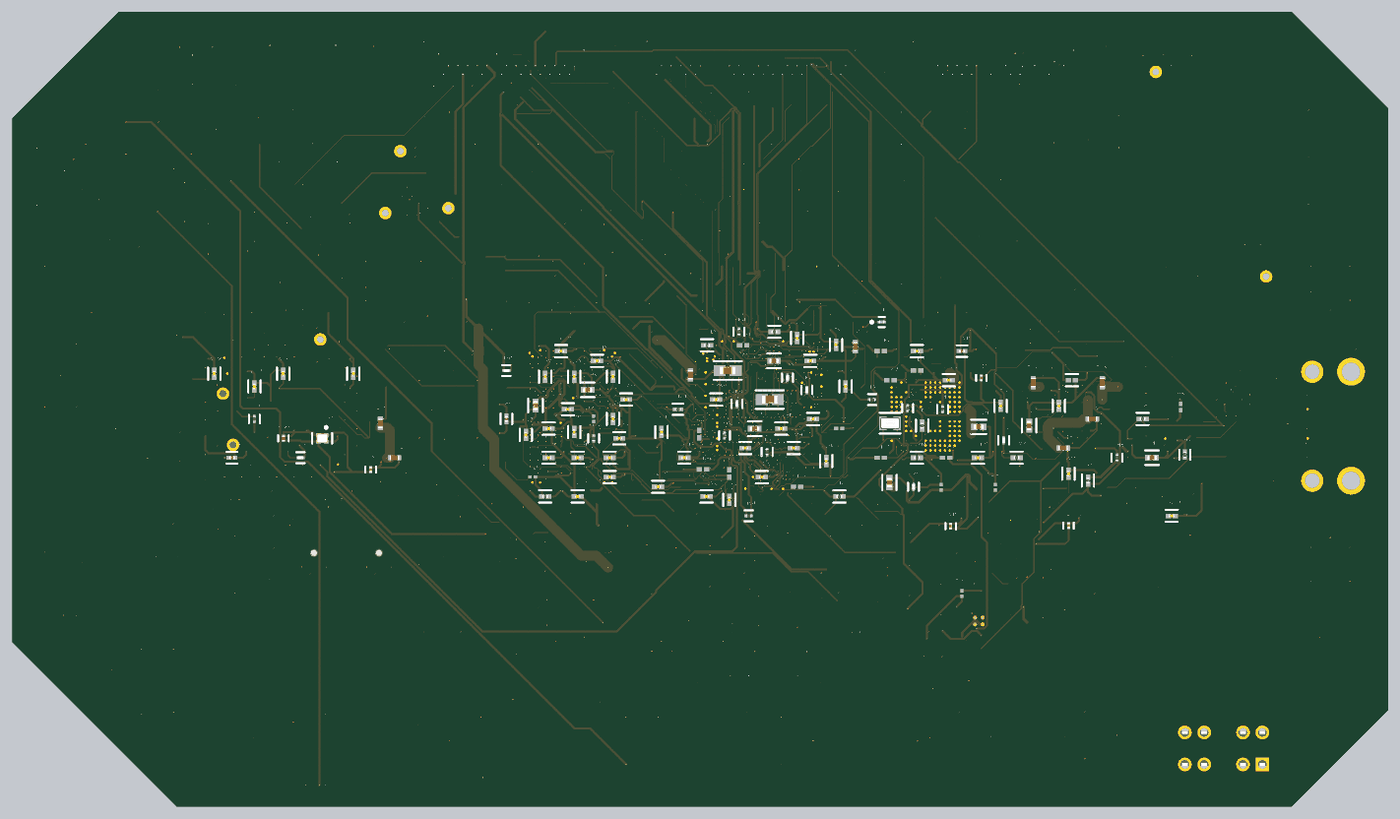
[diagram p23: 3D render of the assembled board from below, using the file's embedded part models]

## Layer stack, top to bottom
Top Solder: solder mask 0.015, SM-001, Dk 3.8
L1_Top: signal copper 0.035
Dielectric 3: prepreg 0.21, PP-022, Dk 4.4
L2_PWR1: plane copper 0.03
Dielectric 4: core 0.2, PP-013, Dk 4.3
L3_Sig1: signal copper 0.03
Dielectric 1: prepreg 0.0711, PP-006, Dk 4.1
L4_GND1: plane copper 0.035, net VDDAO_3V3
Dielectric 5: prepreg 0.114, PP-016, Dk 4.16
L5_Sig2: signal copper 0.03
Dielectric 6: core 0.2, Core-028, Dk 4.3
L6_Sig3: signal copper 0.03
Dielectric 7: prepreg 0.114, PP-016, Dk 4.16
L7_GND2: plane copper 0.035, net GND
Dielectric 2: prepreg 0.0711, PP-006, Dk 4.1
L8_Sig4: signal copper 0.03
Dielectric 8: core 0.2, PP-013, Dk 4.3
L9_GND3: plane copper 0.03
Dielectric 9: prepreg 0.21, PP-022, Dk 4.4
L8_Bottom: signal copper 0.035
Bottom Solder: solder mask 0.015, SM-001, Dk 3.8

## Board outline
0.441,72.349 10.441,82.349 131.441,82.349 142.441,71.349 142.441,17.349 125.441,0.349 10.441,0.349 0.441,10.349

## Design rules (kind name [scope] priority, off if disabled: settings)
AssemblyTestPointUsage [All] p1: isadvanced=TRUE
AssemblyTestpoint [All] p1: isadvanced=TRUE testpointundercomponent=TRUE minsize=1.016 maxsize=2.54 preferedsize=1.524 minholesize=0 maxholesize=1.016 preferedholesize=0.813 testpointgrid=0.025 usegrid=TRUE gridtolerance=0 allowsidetop=TRUE allowsidebottom=TRUE
Clearance Clearance_1 [All] p1 off: isadvanced=TRUE gap=0.01 ignorepadtopadclearanceinfootprint=FALSE
Clearance Clearance_1 [InNetClass('ANTENAS') And (ExistsOnLayer('L3_Sig1') Or ExistsOnLayer('L5_Sig2') Or ExistsOnLayer('L6_Sig3') Or ExistsOnLayer('L8_Sig4')) vs InNetClass('ANTENAS') And (ExistsOnLayer('L3_Sig1') Or ExistsOnLayer('L5_Sig2') Or ExistsOnLayer('L6_Sig3') Or ExistsOnLayer('L8_Sig4'))] p2: gap=0.02 ignorepadtopadclearanceinfootprint=FALSE except(0.05: Hole-Hole) sourcerule=512 cellrowname=ANTENAS cellrowtype=2 cellcolname=ANTENAS cellcoltype=2 innerlayers=TRUE
Clearance Clearance_2 [InNetClass('ANTENAS') And (ExistsOnLayer('L1_Top') Or ExistsOnLayer('L8_Bottom')) vs InNetClass('ANTENAS') And (ExistsOnLayer('L1_Top') Or ExistsOnLayer('L8_Bottom'))] p3: gap=0.02 ignorepadtopadclearanceinfootprint=FALSE except(0.05: Hole-Hole) sourcerule=512 cellrowname=ANTENAS cellrowtype=2 cellcolname=ANTENAS cellcoltype=2 outerlayers=TRUE
Clearance Clearance_3 [InNetClass('ANTENAS') vs InNetClass('ANTENAS')] p4: gap=0.254 ignorepadtopadclearanceinfootprint=FALSE sourcerule=512 cellrowname=ANTENAS cellrowtype=2 cellcolname=ANTENAS cellcoltype=2
Clearance Clearance_1 [InNetClass('ANTENAS') And (ExistsOnLayer('L3_Sig1') Or ExistsOnLayer('L5_Sig2') Or ExistsOnLayer('L6_Sig3') Or ExistsOnLayer('L8_Sig4')) vs (ExistsOnLayer('L3_Sig1') Or ExistsOnLayer('L5_Sig2') Or ExistsOnLayer('L6_Sig3') Or ExistsOnLayer('L8_Sig4'))] p5: gap=0.02 ignorepadtopadclearanceinfootprint=FALSE except(0.254: Hole-Hole) sourcerule=512 cellrowname=ANTENAS cellrowtype=2 cellcolname=All cellcoltype=0 innerlayers=TRUE
Clearance Clearance_2 [InNetClass('ANTENAS') And (ExistsOnLayer('L1_Top') Or ExistsOnLayer('L8_Bottom')) vs (ExistsOnLayer('L1_Top') Or ExistsOnLayer('L8_Bottom'))] p6: gap=0.02 ignorepadtopadclearanceinfootprint=FALSE except(0.254: Hole-Hole) sourcerule=512 cellrowname=ANTENAS cellrowtype=2 cellcolname=All cellcoltype=0 outerlayers=TRUE
Clearance Clearance_3 [InNetClass('ANTENAS')] p7: gap=0.254 ignorepadtopadclearanceinfootprint=FALSE sourcerule=512 cellrowname=ANTENAS cellrowtype=2 cellcolname=All cellcoltype=0
Clearance Clearance_1 [InNetClass('CPU_SIGNAL') And (ExistsOnLayer('L3_Sig1') Or ExistsOnLayer('L5_Sig2') Or ExistsOnLayer('L6_Sig3') Or ExistsOnLayer('L8_Sig4')) vs InNetClass('ANTENAS') And (ExistsOnLayer('L3_Sig1') Or ExistsOnLayer('L5_Sig2') Or ExistsOnLayer('L6_Sig3') Or ExistsOnLayer('L8_Sig4'))] p8: gap=0.02 ignorepadtopadclearanceinfootprint=FALSE except(0.05: Hole-Hole) sourcerule=512 cellrowname=CPU_SIGNAL cellrowtype=2 cellcolname=ANTENAS cellcoltype=2 innerlayers=TRUE
Clearance Clearance_2 [InNetClass('CPU_SIGNAL') And (ExistsOnLayer('L1_Top') Or ExistsOnLayer('L8_Bottom')) vs InNetClass('ANTENAS') And (ExistsOnLayer('L1_Top') Or ExistsOnLayer('L8_Bottom'))] p9: gap=0.02 ignorepadtopadclearanceinfootprint=FALSE except(0.05: Hole-Hole) sourcerule=512 cellrowname=CPU_SIGNAL cellrowtype=2 cellcolname=ANTENAS cellcoltype=2 outerlayers=TRUE
Clearance Clearance_3 [InNetClass('CPU_SIGNAL') vs InNetClass('ANTENAS')] p10: gap=0.254 ignorepadtopadclearanceinfootprint=FALSE sourcerule=512 cellrowname=CPU_SIGNAL cellrowtype=2 cellcolname=ANTENAS cellcoltype=2
Clearance Clearance_1 [InNetClass('CPU_SIGNAL') And (ExistsOnLayer('L3_Sig1') Or ExistsOnLayer('L5_Sig2') Or ExistsOnLayer('L6_Sig3') Or ExistsOnLayer('L8_Sig4')) vs (ExistsOnLayer('L3_Sig1') Or ExistsOnLayer('L5_Sig2') Or ExistsOnLayer('L6_Sig3') Or ExistsOnLayer('L8_Sig4'))] p11: gap=0.02 ignorepadtopadclearanceinfootprint=FALSE except(0.254: Hole-Hole) sourcerule=512 cellrowname=CPU_SIGNAL cellrowtype=2 cellcolname=All cellcoltype=0 innerlayers=TRUE
Clearance Clearance_2 [InNetClass('CPU_SIGNAL') And (ExistsOnLayer('L1_Top') Or ExistsOnLayer('L8_Bottom')) vs (ExistsOnLayer('L1_Top') Or ExistsOnLayer('L8_Bottom'))] p12: gap=0.02 ignorepadtopadclearanceinfootprint=FALSE except(0.254: Hole-Hole) sourcerule=512 cellrowname=CPU_SIGNAL cellrowtype=2 cellcolname=All cellcoltype=0 outerlayers=TRUE
Clearance Clearance_3 [InNetClass('CPU_SIGNAL')] p13: gap=0.254 ignorepadtopadclearanceinfootprint=FALSE sourcerule=512 cellrowname=CPU_SIGNAL cellrowtype=2 cellcolname=All cellcoltype=0
Clearance Clearance_1 [InNetClass('CPU_SIGNAL') And (ExistsOnLayer('L3_Sig1') Or ExistsOnLayer('L5_Sig2') Or ExistsOnLayer('L6_Sig3') Or ExistsOnLayer('L8_Sig4')) vs InNetClass('CPU_SIGNAL') And (ExistsOnLayer('L3_Sig1') Or ExistsOnLayer('L5_Sig2') Or ExistsOnLayer('L6_Sig3') Or ExistsOnLayer('L8_Sig4'))] p14: gap=0.02 ignorepadtopadclearanceinfootprint=FALSE except(0.254: Hole-Hole) sourcerule=512 cellrowname=CPU_SIGNAL cellrowtype=2 cellcolname=CPU_SIGNAL cellcoltype=2 innerlayers=TRUE
Clearance Clearance_2 [InNetClass('CPU_SIGNAL') And (ExistsOnLayer('L1_Top') Or ExistsOnLayer('L8_Bottom')) vs InNetClass('CPU_SIGNAL') And (ExistsOnLayer('L1_Top') Or ExistsOnLayer('L8_Bottom'))] p15: gap=0.02 ignorepadtopadclearanceinfootprint=FALSE except(0.254: Hole-Hole) sourcerule=512 cellrowname=CPU_SIGNAL cellrowtype=2 cellcolname=CPU_SIGNAL cellcoltype=2 outerlayers=TRUE
Clearance Clearance_3 [InNetClass('CPU_SIGNAL') vs InNetClass('CPU_SIGNAL')] p16: gap=0.254 ignorepadtopadclearanceinfootprint=FALSE sourcerule=512 cellrowname=CPU_SIGNAL cellrowtype=2 cellcolname=CPU_SIGNAL cellcoltype=2
Clearance Clearance_1 [InNetClass('CSI_HIGH_SPEED') And (ExistsOnLayer('L3_Sig1') Or ExistsOnLayer('L5_Sig2') Or ExistsOnLayer('L6_Sig3') Or ExistsOnLayer('L8_Sig4')) vs InNetClass('ANTENAS') And (ExistsOnLayer('L3_Sig1') Or ExistsOnLayer('L5_Sig2') Or ExistsOnLayer('L6_Sig3') Or ExistsOnLayer('L8_Sig4'))] p17: gap=0.02 ignorepadtopadclearanceinfootprint=FALSE except(0.05: Hole-Hole) sourcerule=512 cellrowname=CSI_HIGH_SPEED cellrowtype=2 cellcolname=ANTENAS cellcoltype=2 innerlayers=TRUE
Clearance Clearance_2 [InNetClass('CSI_HIGH_SPEED') And (ExistsOnLayer('L1_Top') Or ExistsOnLayer('L8_Bottom')) vs InNetClass('ANTENAS') And (ExistsOnLayer('L1_Top') Or ExistsOnLayer('L8_Bottom'))] p18: gap=0.02 ignorepadtopadclearanceinfootprint=FALSE except(0.05: Hole-Hole) sourcerule=512 cellrowname=CSI_HIGH_SPEED cellrowtype=2 cellcolname=ANTENAS cellcoltype=2 outerlayers=TRUE
Clearance Clearance_3 [InNetClass('CSI_HIGH_SPEED') vs InNetClass('ANTENAS')] p19: gap=0.254 ignorepadtopadclearanceinfootprint=FALSE sourcerule=512 cellrowname=CSI_HIGH_SPEED cellrowtype=2 cellcolname=ANTENAS cellcoltype=2
Clearance Clearance_1 [InNetClass('CSI_HIGH_SPEED') And (ExistsOnLayer('L3_Sig1') Or ExistsOnLayer('L5_Sig2') Or ExistsOnLayer('L6_Sig3') Or ExistsOnLayer('L8_Sig4')) vs (ExistsOnLayer('L3_Sig1') Or ExistsOnLayer('L5_Sig2') Or ExistsOnLayer('L6_Sig3') Or ExistsOnLayer('L8_Sig4'))] p20: gap=0.02 ignorepadtopadclearanceinfootprint=FALSE except(0.254: Hole-Hole) sourcerule=512 cellrowname=CSI_HIGH_SPEED cellrowtype=2 cellcolname=All cellcoltype=0 innerlayers=TRUE
Clearance Clearance_2 [InNetClass('CSI_HIGH_SPEED') And (ExistsOnLayer('L1_Top') Or ExistsOnLayer('L8_Bottom')) vs (ExistsOnLayer('L1_Top') Or ExistsOnLayer('L8_Bottom'))] p21: gap=0.02 ignorepadtopadclearanceinfootprint=FALSE except(0.254: Hole-Hole) sourcerule=512 cellrowname=CSI_HIGH_SPEED cellrowtype=2 cellcolname=All cellcoltype=0 outerlayers=TRUE
Clearance Clearance_3 [InNetClass('CSI_HIGH_SPEED')] p22: gap=0.254 ignorepadtopadclearanceinfootprint=FALSE sourcerule=512 cellrowname=CSI_HIGH_SPEED cellrowtype=2 cellcolname=All cellcoltype=0
Clearance Clearance_1 [InNetClass('CSI_HIGH_SPEED') And (ExistsOnLayer('L3_Sig1') Or ExistsOnLayer('L5_Sig2') Or ExistsOnLayer('L6_Sig3') Or ExistsOnLayer('L8_Sig4')) vs InNetClass('CPU_SIGNAL') And (ExistsOnLayer('L3_Sig1') Or ExistsOnLayer('L5_Sig2') Or ExistsOnLayer('L6_Sig3') Or ExistsOnLayer('L8_Sig4'))] p23: gap=0.02 ignorepadtopadclearanceinfootprint=FALSE except(0.254: Hole-Hole) sourcerule=512 cellrowname=CSI_HIGH_SPEED cellrowtype=2 cellcolname=CPU_SIGNAL cellcoltype=2 innerlayers=TRUE
Clearance Clearance_2 [InNetClass('CSI_HIGH_SPEED') And (ExistsOnLayer('L1_Top') Or ExistsOnLayer('L8_Bottom')) vs InNetClass('CPU_SIGNAL') And (ExistsOnLayer('L1_Top') Or ExistsOnLayer('L8_Bottom'))] p24: gap=0.02 ignorepadtopadclearanceinfootprint=FALSE except(0.254: Hole-Hole) sourcerule=512 cellrowname=CSI_HIGH_SPEED cellrowtype=2 cellcolname=CPU_SIGNAL cellcoltype=2 outerlayers=TRUE
Clearance Clearance_3 [InNetClass('CSI_HIGH_SPEED') vs InNetClass('CPU_SIGNAL')] p25: gap=0.254 ignorepadtopadclearanceinfootprint=FALSE sourcerule=512 cellrowname=CSI_HIGH_SPEED cellrowtype=2 cellcolname=CPU_SIGNAL cellcoltype=2
Clearance Clearance_1 [InNetClass('CSI_HIGH_SPEED') And (ExistsOnLayer('L3_Sig1') Or ExistsOnLayer('L5_Sig2') Or ExistsOnLayer('L6_Sig3') Or ExistsOnLayer('L8_Sig4')) vs InNetClass('CSI_HIGH_SPEED') And (ExistsOnLayer('L3_Sig1') Or ExistsOnLayer('L5_Sig2') Or ExistsOnLayer('L6_Sig3') Or ExistsOnLayer('L8_Sig4'))] p26: gap=0.02 ignorepadtopadclearanceinfootprint=FALSE except(0.254: Hole-Hole) sourcerule=512 cellrowname=CSI_HIGH_SPEED cellrowtype=2 cellcolname=CSI_HIGH_SPEED cellcoltype=2 innerlayers=TRUE
Clearance Clearance_2 [InNetClass('CSI_HIGH_SPEED') And (ExistsOnLayer('L1_Top') Or ExistsOnLayer('L8_Bottom')) vs InNetClass('CSI_HIGH_SPEED') And (ExistsOnLayer('L1_Top') Or ExistsOnLayer('L8_Bottom'))] p27: gap=0.02 ignorepadtopadclearanceinfootprint=FALSE except(0.254: Hole-Hole) sourcerule=512 cellrowname=CSI_HIGH_SPEED cellrowtype=2 cellcolname=CSI_HIGH_SPEED cellcoltype=2 outerlayers=TRUE
Clearance Clearance_3 [InNetClass('CSI_HIGH_SPEED') vs InNetClass('CSI_HIGH_SPEED')] p28: gap=0.254 ignorepadtopadclearanceinfootprint=FALSE sourcerule=512 cellrowname=CSI_HIGH_SPEED cellrowtype=2 cellcolname=CSI_HIGH_SPEED cellcoltype=2
Clearance Clearance_1 [InNetClass('DDR1_HIGH_SPEED') And (ExistsOnLayer('L3_Sig1') Or ExistsOnLayer('L5_Sig2') Or ExistsOnLayer('L6_Sig3') Or ExistsOnLayer('L8_Sig4')) vs InNetClass('ANTENAS') And (ExistsOnLayer('L3_Sig1') Or ExistsOnLayer('L5_Sig2') Or ExistsOnLayer('L6_Sig3') Or ExistsOnLayer('L8_Sig4'))] p29: gap=0.02 ignorepadtopadclearanceinfootprint=FALSE except(0.05: Hole-Hole) sourcerule=512 cellrowname=DDR1_HIGH_SPEED cellrowtype=2 cellcolname=ANTENAS cellcoltype=2 innerlayers=TRUE
Clearance Clearance_2 [InNetClass('DDR1_HIGH_SPEED') And (ExistsOnLayer('L1_Top') Or ExistsOnLayer('L8_Bottom')) vs InNetClass('ANTENAS') And (ExistsOnLayer('L1_Top') Or ExistsOnLayer('L8_Bottom'))] p30: gap=0.02 ignorepadtopadclearanceinfootprint=FALSE except(0.05: Hole-Hole) sourcerule=512 cellrowname=DDR1_HIGH_SPEED cellrowtype=2 cellcolname=ANTENAS cellcoltype=2 outerlayers=TRUE
Clearance Clearance_3 [InNetClass('DDR1_HIGH_SPEED') vs InNetClass('ANTENAS')] p31: gap=0.254 ignorepadtopadclearanceinfootprint=FALSE sourcerule=512 cellrowname=DDR1_HIGH_SPEED cellrowtype=2 cellcolname=ANTENAS cellcoltype=2
Clearance Clearance_1 [InNetClass('DDR1_HIGH_SPEED') And (ExistsOnLayer('L3_Sig1') Or ExistsOnLayer('L5_Sig2') Or ExistsOnLayer('L6_Sig3') Or ExistsOnLayer('L8_Sig4')) vs (ExistsOnLayer('L3_Sig1') Or ExistsOnLayer('L5_Sig2') Or ExistsOnLayer('L6_Sig3') Or ExistsOnLayer('L8_Sig4'))] p32: gap=0.02 ignorepadtopadclearanceinfootprint=FALSE except(0.089: Hole-Hole) sourcerule=512 cellrowname=DDR1_HIGH_SPEED cellrowtype=2 cellcolname=All cellcoltype=0 innerlayers=TRUE
Clearance Clearance_2 [InNetClass('DDR1_HIGH_SPEED') And (ExistsOnLayer('L1_Top') Or ExistsOnLayer('L8_Bottom')) vs (ExistsOnLayer('L1_Top') Or ExistsOnLayer('L8_Bottom'))] p33: gap=0.02 ignorepadtopadclearanceinfootprint=FALSE except(0.089: Hole-Hole) sourcerule=512 cellrowname=DDR1_HIGH_SPEED cellrowtype=2 cellcolname=All cellcoltype=0 outerlayers=TRUE
Clearance Clearance_3 [InNetClass('DDR1_HIGH_SPEED')] p34: gap=0.254 ignorepadtopadclearanceinfootprint=FALSE sourcerule=512 cellrowname=DDR1_HIGH_SPEED cellrowtype=2 cellcolname=All cellcoltype=0
Clearance Clearance_1 [InNetClass('DDR1_HIGH_SPEED') And (ExistsOnLayer('L3_Sig1') Or ExistsOnLayer('L5_Sig2') Or ExistsOnLayer('L6_Sig3') Or ExistsOnLayer('L8_Sig4')) vs InNetClass('CPU_SIGNAL') And (ExistsOnLayer('L3_Sig1') Or ExistsOnLayer('L5_Sig2') Or ExistsOnLayer('L6_Sig3') Or ExistsOnLayer('L8_Sig4'))] p35: gap=0.02 ignorepadtopadclearanceinfootprint=FALSE except(0.254: Hole-Hole) sourcerule=512 cellrowname=DDR1_HIGH_SPEED cellrowtype=2 cellcolname=CPU_SIGNAL cellcoltype=2 innerlayers=TRUE
Clearance Clearance_2 [InNetClass('DDR1_HIGH_SPEED') And (ExistsOnLayer('L1_Top') Or ExistsOnLayer('L8_Bottom')) vs InNetClass('CPU_SIGNAL') And (ExistsOnLayer('L1_Top') Or ExistsOnLayer('L8_Bottom'))] p36: gap=0.02 ignorepadtopadclearanceinfootprint=FALSE except(0.254: Hole-Hole) sourcerule=512 cellrowname=DDR1_HIGH_SPEED cellrowtype=2 cellcolname=CPU_SIGNAL cellcoltype=2 outerlayers=TRUE
Clearance Clearance_3 [InNetClass('DDR1_HIGH_SPEED') vs InNetClass('CPU_SIGNAL')] p37: gap=0.254 ignorepadtopadclearanceinfootprint=FALSE sourcerule=512 cellrowname=DDR1_HIGH_SPEED cellrowtype=2 cellcolname=CPU_SIGNAL cellcoltype=2
Clearance Clearance_1 [InNetClass('DDR1_HIGH_SPEED') And (ExistsOnLayer('L3_Sig1') Or ExistsOnLayer('L5_Sig2') Or ExistsOnLayer('L6_Sig3') Or ExistsOnLayer('L8_Sig4')) vs InNetClass('CSI_HIGH_SPEED') And (ExistsOnLayer('L3_Sig1') Or ExistsOnLayer('L5_Sig2') Or ExistsOnLayer('L6_Sig3') Or ExistsOnLayer('L8_Sig4'))] p38: gap=0.02 ignorepadtopadclearanceinfootprint=FALSE except(0.254: Hole-Hole) sourcerule=512 cellrowname=DDR1_HIGH_SPEED cellrowtype=2 cellcolname=CSI_HIGH_SPEED cellcoltype=2 innerlayers=TRUE
Clearance Clearance_2 [InNetClass('DDR1_HIGH_SPEED') And (ExistsOnLayer('L1_Top') Or ExistsOnLayer('L8_Bottom')) vs InNetClass('CSI_HIGH_SPEED') And (ExistsOnLayer('L1_Top') Or ExistsOnLayer('L8_Bottom'))] p39: gap=0.02 ignorepadtopadclearanceinfootprint=FALSE except(0.254: Hole-Hole) sourcerule=512 cellrowname=DDR1_HIGH_SPEED cellrowtype=2 cellcolname=CSI_HIGH_SPEED cellcoltype=2 outerlayers=TRUE
Clearance Clearance_3 [InNetClass('DDR1_HIGH_SPEED') vs InNetClass('CSI_HIGH_SPEED')] p40: gap=0.254 ignorepadtopadclearanceinfootprint=FALSE sourcerule=512 cellrowname=DDR1_HIGH_SPEED cellrowtype=2 cellcolname=CSI_HIGH_SPEED cellcoltype=2
Clearance Clearance_1 [InNetClass('DDR1_HIGH_SPEED') And (ExistsOnLayer('L3_Sig1') Or ExistsOnLayer('L5_Sig2') Or ExistsOnLayer('L6_Sig3') Or ExistsOnLayer('L8_Sig4')) vs InNetClass('DDR1_HIGH_SPEED') And (ExistsOnLayer('L3_Sig1') Or ExistsOnLayer('L5_Sig2') Or ExistsOnLayer('L6_Sig3') Or ExistsOnLayer('L8_Sig4'))] p41: gap=0.02 ignorepadtopadclearanceinfootprint=FALSE except(0.089: Hole-Hole) sourcerule=512 cellrowname=DDR1_HIGH_SPEED cellrowtype=2 cellcolname=DDR1_HIGH_SPEED cellcoltype=2 innerlayers=TRUE
Clearance Clearance_2 [InNetClass('DDR1_HIGH_SPEED') And (ExistsOnLayer('L1_Top') Or ExistsOnLayer('L8_Bottom')) vs InNetClass('DDR1_HIGH_SPEED') And (ExistsOnLayer('L1_Top') Or ExistsOnLayer('L8_Bottom'))] p42: gap=0.02 ignorepadtopadclearanceinfootprint=FALSE except(0.089: Hole-Hole) sourcerule=512 cellrowname=DDR1_HIGH_SPEED cellrowtype=2 cellcolname=DDR1_HIGH_SPEED cellcoltype=2 outerlayers=TRUE
Clearance Clearance_3 [InNetClass('DDR1_HIGH_SPEED') vs InNetClass('DDR1_HIGH_SPEED')] p43: gap=0.254 ignorepadtopadclearanceinfootprint=FALSE sourcerule=512 cellrowname=DDR1_HIGH_SPEED cellrowtype=2 cellcolname=DDR1_HIGH_SPEED cellcoltype=2
Clearance Clearance_1 [InNetClass('EMMC_HIGH_SPEED') And (ExistsOnLayer('L3_Sig1') Or ExistsOnLayer('L5_Sig2') Or ExistsOnLayer('L6_Sig3') Or ExistsOnLayer('L8_Sig4')) vs InNetClass('ANTENAS') And (ExistsOnLayer('L3_Sig1') Or ExistsOnLayer('L5_Sig2') Or ExistsOnLayer('L6_Sig3') Or ExistsOnLayer('L8_Sig4'))] p44: gap=0.02 ignorepadtopadclearanceinfootprint=FALSE except(0.05: Hole-Hole) sourcerule=512 cellrowname=EMMC_HIGH_SPEED cellrowtype=2 cellcolname=ANTENAS cellcoltype=2 innerlayers=TRUE
Clearance Clearance_2 [InNetClass('EMMC_HIGH_SPEED') And (ExistsOnLayer('L1_Top') Or ExistsOnLayer('L8_Bottom')) vs InNetClass('ANTENAS') And (ExistsOnLayer('L1_Top') Or ExistsOnLayer('L8_Bottom'))] p45: gap=0.02 ignorepadtopadclearanceinfootprint=FALSE except(0.05: Hole-Hole) sourcerule=512 cellrowname=EMMC_HIGH_SPEED cellrowtype=2 cellcolname=ANTENAS cellcoltype=2 outerlayers=TRUE
Clearance Clearance_3 [InNetClass('EMMC_HIGH_SPEED') vs InNetClass('ANTENAS')] p46: gap=0.254 ignorepadtopadclearanceinfootprint=FALSE sourcerule=512 cellrowname=EMMC_HIGH_SPEED cellrowtype=2 cellcolname=ANTENAS cellcoltype=2
Clearance Clearance_1 [InNetClass('EMMC_HIGH_SPEED') And (ExistsOnLayer('L3_Sig1') Or ExistsOnLayer('L5_Sig2') Or ExistsOnLayer('L6_Sig3') Or ExistsOnLayer('L8_Sig4')) vs (ExistsOnLayer('L3_Sig1') Or ExistsOnLayer('L5_Sig2') Or ExistsOnLayer('L6_Sig3') Or ExistsOnLayer('L8_Sig4'))] p47: gap=0.02 ignorepadtopadclearanceinfootprint=FALSE except(0.254: Hole-Hole) sourcerule=512 cellrowname=EMMC_HIGH_SPEED cellrowtype=2 cellcolname=All cellcoltype=0 innerlayers=TRUE
Clearance Clearance_2 [InNetClass('EMMC_HIGH_SPEED') And (ExistsOnLayer('L1_Top') Or ExistsOnLayer('L8_Bottom')) vs (ExistsOnLayer('L1_Top') Or ExistsOnLayer('L8_Bottom'))] p48: gap=0.02 ignorepadtopadclearanceinfootprint=FALSE except(0.254: Hole-Hole) sourcerule=512 cellrowname=EMMC_HIGH_SPEED cellrowtype=2 cellcolname=All cellcoltype=0 outerlayers=TRUE
Clearance Clearance_3 [InNetClass('EMMC_HIGH_SPEED')] p49: gap=0.254 ignorepadtopadclearanceinfootprint=FALSE sourcerule=512 cellrowname=EMMC_HIGH_SPEED cellrowtype=2 cellcolname=All cellcoltype=0
Clearance Clearance_1 [InNetClass('EMMC_HIGH_SPEED') And (ExistsOnLayer('L3_Sig1') Or ExistsOnLayer('L5_Sig2') Or ExistsOnLayer('L6_Sig3') Or ExistsOnLayer('L8_Sig4')) vs InNetClass('CPU_SIGNAL') And (ExistsOnLayer('L3_Sig1') Or ExistsOnLayer('L5_Sig2') Or ExistsOnLayer('L6_Sig3') Or ExistsOnLayer('L8_Sig4'))] p50: gap=0.02 ignorepadtopadclearanceinfootprint=FALSE except(0.254: Hole-Hole) sourcerule=512 cellrowname=EMMC_HIGH_SPEED cellrowtype=2 cellcolname=CPU_SIGNAL cellcoltype=2 innerlayers=TRUE
Clearance Clearance_2 [InNetClass('EMMC_HIGH_SPEED') And (ExistsOnLayer('L1_Top') Or ExistsOnLayer('L8_Bottom')) vs InNetClass('CPU_SIGNAL') And (ExistsOnLayer('L1_Top') Or ExistsOnLayer('L8_Bottom'))] p51: gap=0.02 ignorepadtopadclearanceinfootprint=FALSE except(0.254: Hole-Hole) sourcerule=512 cellrowname=EMMC_HIGH_SPEED cellrowtype=2 cellcolname=CPU_SIGNAL cellcoltype=2 outerlayers=TRUE
Clearance Clearance_3 [InNetClass('EMMC_HIGH_SPEED') vs InNetClass('CPU_SIGNAL')] p52: gap=0.254 ignorepadtopadclearanceinfootprint=FALSE sourcerule=512 cellrowname=EMMC_HIGH_SPEED cellrowtype=2 cellcolname=CPU_SIGNAL cellcoltype=2
Clearance Clearance_1 [InNetClass('EMMC_HIGH_SPEED') And (ExistsOnLayer('L3_Sig1') Or ExistsOnLayer('L5_Sig2') Or ExistsOnLayer('L6_Sig3') Or ExistsOnLayer('L8_Sig4')) vs InNetClass('CSI_HIGH_SPEED') And (ExistsOnLayer('L3_Sig1') Or ExistsOnLayer('L5_Sig2') Or ExistsOnLayer('L6_Sig3') Or ExistsOnLayer('L8_Sig4'))] p53: gap=0.02 ignorepadtopadclearanceinfootprint=FALSE except(0.254: Hole-Hole) sourcerule=512 cellrowname=EMMC_HIGH_SPEED cellrowtype=2 cellcolname=CSI_HIGH_SPEED cellcoltype=2 innerlayers=TRUE
Clearance Clearance_2 [InNetClass('EMMC_HIGH_SPEED') And (ExistsOnLayer('L1_Top') Or ExistsOnLayer('L8_Bottom')) vs InNetClass('CSI_HIGH_SPEED') And (ExistsOnLayer('L1_Top') Or ExistsOnLayer('L8_Bottom'))] p54: gap=0.02 ignorepadtopadclearanceinfootprint=FALSE except(0.254: Hole-Hole) sourcerule=512 cellrowname=EMMC_HIGH_SPEED cellrowtype=2 cellcolname=CSI_HIGH_SPEED cellcoltype=2 outerlayers=TRUE
Clearance Clearance_3 [InNetClass('EMMC_HIGH_SPEED') vs InNetClass('CSI_HIGH_SPEED')] p55: gap=0.254 ignorepadtopadclearanceinfootprint=FALSE sourcerule=512 cellrowname=EMMC_HIGH_SPEED cellrowtype=2 cellcolname=CSI_HIGH_SPEED cellcoltype=2
Clearance Clearance_1 [InNetClass('EMMC_HIGH_SPEED') And (ExistsOnLayer('L3_Sig1') Or ExistsOnLayer('L5_Sig2') Or ExistsOnLayer('L6_Sig3') Or ExistsOnLayer('L8_Sig4')) vs InNetClass('DDR1_HIGH_SPEED') And (ExistsOnLayer('L3_Sig1') Or ExistsOnLayer('L5_Sig2') Or ExistsOnLayer('L6_Sig3') Or ExistsOnLayer('L8_Sig4'))] p56: gap=0.02 ignorepadtopadclearanceinfootprint=FALSE except(0.089: Hole-Hole) sourcerule=512 cellrowname=EMMC_HIGH_SPEED cellrowtype=2 cellcolname=DDR1_HIGH_SPEED cellcoltype=2 innerlayers=TRUE
Clearance Clearance_2 [InNetClass('EMMC_HIGH_SPEED') And (ExistsOnLayer('L1_Top') Or ExistsOnLayer('L8_Bottom')) vs InNetClass('DDR1_HIGH_SPEED') And (ExistsOnLayer('L1_Top') Or ExistsOnLayer('L8_Bottom'))] p57: gap=0.02 ignorepadtopadclearanceinfootprint=FALSE except(0.089: Hole-Hole) sourcerule=512 cellrowname=EMMC_HIGH_SPEED cellrowtype=2 cellcolname=DDR1_HIGH_SPEED cellcoltype=2 outerlayers=TRUE
Clearance Clearance_3 [InNetClass('EMMC_HIGH_SPEED') vs InNetClass('DDR1_HIGH_SPEED')] p58: gap=0.254 ignorepadtopadclearanceinfootprint=FALSE sourcerule=512 cellrowname=EMMC_HIGH_SPEED cellrowtype=2 cellcolname=DDR1_HIGH_SPEED cellcoltype=2
Clearance Clearance_1 [InNetClass('EMMC_HIGH_SPEED') And (ExistsOnLayer('L3_Sig1') Or ExistsOnLayer('L5_Sig2') Or ExistsOnLayer('L6_Sig3') Or ExistsOnLayer('L8_Sig4')) vs InNetClass('EMMC_HIGH_SPEED') And (ExistsOnLayer('L3_Sig1') Or ExistsOnLayer('L5_Sig2') Or ExistsOnLayer('L6_Sig3') Or ExistsOnLayer('L8_Sig4'))] p59: gap=0.02 ignorepadtopadclearanceinfootprint=FALSE except(0.254: Hole-Hole) sourcerule=512 cellrowname=EMMC_HIGH_SPEED cellrowtype=2 cellcolname=EMMC_HIGH_SPEED cellcoltype=2 innerlayers=TRUE
Clearance Clearance_2 [InNetClass('EMMC_HIGH_SPEED') And (ExistsOnLayer('L1_Top') Or ExistsOnLayer('L8_Bottom')) vs InNetClass('EMMC_HIGH_SPEED') And (ExistsOnLayer('L1_Top') Or ExistsOnLayer('L8_Bottom'))] p60: gap=0.02 ignorepadtopadclearanceinfootprint=FALSE except(0.254: Hole-Hole) sourcerule=512 cellrowname=EMMC_HIGH_SPEED cellrowtype=2 cellcolname=EMMC_HIGH_SPEED cellcoltype=2 outerlayers=TRUE
Clearance Clearance_3 [InNetClass('EMMC_HIGH_SPEED') vs InNetClass('EMMC_HIGH_SPEED')] p61: gap=0.254 ignorepadtopadclearanceinfootprint=FALSE sourcerule=512 cellrowname=EMMC_HIGH_SPEED cellrowtype=2 cellcolname=EMMC_HIGH_SPEED cellcoltype=2
Clearance Clearance_1 [InNetClass('I2S_PROTOCOL') And (ExistsOnLayer('L3_Sig1') Or ExistsOnLayer('L5_Sig2') Or ExistsOnLayer('L6_Sig3') Or ExistsOnLayer('L8_Sig4')) vs InNetClass('ANTENAS') And (ExistsOnLayer('L3_Sig1') Or ExistsOnLayer('L5_Sig2') Or ExistsOnLayer('L6_Sig3') Or ExistsOnLayer('L8_Sig4'))] p62: gap=0.02 ignorepadtopadclearanceinfootprint=FALSE except(0.05: Hole-Hole) sourcerule=512 cellrowname=I2S_PROTOCOL cellrowtype=2 cellcolname=ANTENAS cellcoltype=2 innerlayers=TRUE
Clearance Clearance_2 [InNetClass('I2S_PROTOCOL') And (ExistsOnLayer('L1_Top') Or ExistsOnLayer('L8_Bottom')) vs InNetClass('ANTENAS') And (ExistsOnLayer('L1_Top') Or ExistsOnLayer('L8_Bottom'))] p63: gap=0.02 ignorepadtopadclearanceinfootprint=FALSE except(0.05: Hole-Hole) sourcerule=512 cellrowname=I2S_PROTOCOL cellrowtype=2 cellcolname=ANTENAS cellcoltype=2 outerlayers=TRUE
Clearance Clearance_3 [InNetClass('I2S_PROTOCOL') vs InNetClass('ANTENAS')] p64: gap=0.254 ignorepadtopadclearanceinfootprint=FALSE sourcerule=512 cellrowname=I2S_PROTOCOL cellrowtype=2 cellcolname=ANTENAS cellcoltype=2
Clearance Clearance_1 [InNetClass('I2S_PROTOCOL') And (ExistsOnLayer('L3_Sig1') Or ExistsOnLayer('L5_Sig2') Or ExistsOnLayer('L6_Sig3') Or ExistsOnLayer('L8_Sig4')) vs (ExistsOnLayer('L3_Sig1') Or ExistsOnLayer('L5_Sig2') Or ExistsOnLayer('L6_Sig3') Or ExistsOnLayer('L8_Sig4'))] p65: gap=0.02 ignorepadtopadclearanceinfootprint=FALSE except(0.254: Hole-Hole) sourcerule=512 cellrowname=I2S_PROTOCOL cellrowtype=2 cellcolname=All cellcoltype=0 innerlayers=TRUE
Clearance Clearance_2 [InNetClass('I2S_PROTOCOL') And (ExistsOnLayer('L1_Top') Or ExistsOnLayer('L8_Bottom')) vs (ExistsOnLayer('L1_Top') Or ExistsOnLayer('L8_Bottom'))] p66: gap=0.02 ignorepadtopadclearanceinfootprint=FALSE except(0.254: Hole-Hole) sourcerule=512 cellrowname=I2S_PROTOCOL cellrowtype=2 cellcolname=All cellcoltype=0 outerlayers=TRUE
Clearance Clearance_3 [InNetClass('I2S_PROTOCOL')] p67: gap=0.254 ignorepadtopadclearanceinfootprint=FALSE sourcerule=512 cellrowname=I2S_PROTOCOL cellrowtype=2 cellcolname=All cellcoltype=0
Clearance Clearance_1 [InNetClass('I2S_PROTOCOL') And (ExistsOnLayer('L3_Sig1') Or ExistsOnLayer('L5_Sig2') Or ExistsOnLayer('L6_Sig3') Or ExistsOnLayer('L8_Sig4')) vs InNetClass('CPU_SIGNAL') And (ExistsOnLayer('L3_Sig1') Or ExistsOnLayer('L5_Sig2') Or ExistsOnLayer('L6_Sig3') Or ExistsOnLayer('L8_Sig4'))] p68: gap=0.02 ignorepadtopadclearanceinfootprint=FALSE except(0.254: Hole-Hole) sourcerule=512 cellrowname=I2S_PROTOCOL cellrowtype=2 cellcolname=CPU_SIGNAL cellcoltype=2 innerlayers=TRUE
Clearance Clearance_2 [InNetClass('I2S_PROTOCOL') And (ExistsOnLayer('L1_Top') Or ExistsOnLayer('L8_Bottom')) vs InNetClass('CPU_SIGNAL') And (ExistsOnLayer('L1_Top') Or ExistsOnLayer('L8_Bottom'))] p69: gap=0.02 ignorepadtopadclearanceinfootprint=FALSE except(0.254: Hole-Hole) sourcerule=512 cellrowname=I2S_PROTOCOL cellrowtype=2 cellcolname=CPU_SIGNAL cellcoltype=2 outerlayers=TRUE
Clearance Clearance_3 [InNetClass('I2S_PROTOCOL') vs InNetClass('CPU_SIGNAL')] p70: gap=0.254 ignorepadtopadclearanceinfootprint=FALSE sourcerule=512 cellrowname=I2S_PROTOCOL cellrowtype=2 cellcolname=CPU_SIGNAL cellcoltype=2
Clearance Clearance_1 [InNetClass('I2S_PROTOCOL') And (ExistsOnLayer('L3_Sig1') Or ExistsOnLayer('L5_Sig2') Or ExistsOnLayer('L6_Sig3') Or ExistsOnLayer('L8_Sig4')) vs InNetClass('CSI_HIGH_SPEED') And (ExistsOnLayer('L3_Sig1') Or ExistsOnLayer('L5_Sig2') Or ExistsOnLayer('L6_Sig3') Or ExistsOnLayer('L8_Sig4'))] p71: gap=0.02 ignorepadtopadclearanceinfootprint=FALSE except(0.254: Hole-Hole) sourcerule=512 cellrowname=I2S_PROTOCOL cellrowtype=2 cellcolname=CSI_HIGH_SPEED cellcoltype=2 innerlayers=TRUE
Clearance Clearance_2 [InNetClass('I2S_PROTOCOL') And (ExistsOnLayer('L1_Top') Or ExistsOnLayer('L8_Bottom')) vs InNetClass('CSI_HIGH_SPEED') And (ExistsOnLayer('L1_Top') Or ExistsOnLayer('L8_Bottom'))] p72: gap=0.02 ignorepadtopadclearanceinfootprint=FALSE except(0.254: Hole-Hole) sourcerule=512 cellrowname=I2S_PROTOCOL cellrowtype=2 cellcolname=CSI_HIGH_SPEED cellcoltype=2 outerlayers=TRUE
Clearance Clearance_3 [InNetClass('I2S_PROTOCOL') vs InNetClass('CSI_HIGH_SPEED')] p73: gap=0.254 ignorepadtopadclearanceinfootprint=FALSE sourcerule=512 cellrowname=I2S_PROTOCOL cellrowtype=2 cellcolname=CSI_HIGH_SPEED cellcoltype=2
Clearance Clearance_1 [InNetClass('I2S_PROTOCOL') And (ExistsOnLayer('L3_Sig1') Or ExistsOnLayer('L5_Sig2') Or ExistsOnLayer('L6_Sig3') Or ExistsOnLayer('L8_Sig4')) vs InNetClass('DDR1_HIGH_SPEED') And (ExistsOnLayer('L3_Sig1') Or ExistsOnLayer('L5_Sig2') Or ExistsOnLayer('L6_Sig3') Or ExistsOnLayer('L8_Sig4'))] p74: gap=0.02 ignorepadtopadclearanceinfootprint=FALSE except(0.089: Hole-Hole) sourcerule=512 cellrowname=I2S_PROTOCOL cellrowtype=2 cellcolname=DDR1_HIGH_SPEED cellcoltype=2 innerlayers=TRUE
Clearance Clearance_2 [InNetClass('I2S_PROTOCOL') And (ExistsOnLayer('L1_Top') Or ExistsOnLayer('L8_Bottom')) vs InNetClass('DDR1_HIGH_SPEED') And (ExistsOnLayer('L1_Top') Or ExistsOnLayer('L8_Bottom'))] p75: gap=0.02 ignorepadtopadclearanceinfootprint=FALSE except(0.089: Hole-Hole) sourcerule=512 cellrowname=I2S_PROTOCOL cellrowtype=2 cellcolname=DDR1_HIGH_SPEED cellcoltype=2 outerlayers=TRUE
Clearance Clearance_3 [InNetClass('I2S_PROTOCOL') vs InNetClass('DDR1_HIGH_SPEED')] p76: gap=0.254 ignorepadtopadclearanceinfootprint=FALSE sourcerule=512 cellrowname=I2S_PROTOCOL cellrowtype=2 cellcolname=DDR1_HIGH_SPEED cellcoltype=2
Clearance Clearance_1 [InNetClass('I2S_PROTOCOL') And (ExistsOnLayer('L3_Sig1') Or ExistsOnLayer('L5_Sig2') Or ExistsOnLayer('L6_Sig3') Or ExistsOnLayer('L8_Sig4')) vs InNetClass('EMMC_HIGH_SPEED') And (ExistsOnLayer('L3_Sig1') Or ExistsOnLayer('L5_Sig2') Or ExistsOnLayer('L6_Sig3') Or ExistsOnLayer('L8_Sig4'))] p77: gap=0.02 ignorepadtopadclearanceinfootprint=FALSE except(0.254: Hole-Hole) sourcerule=512 cellrowname=I2S_PROTOCOL cellrowtype=2 cellcolname=EMMC_HIGH_SPEED cellcoltype=2 innerlayers=TRUE
Clearance Clearance_2 [InNetClass('I2S_PROTOCOL') And (ExistsOnLayer('L1_Top') Or ExistsOnLayer('L8_Bottom')) vs InNetClass('EMMC_HIGH_SPEED') And (ExistsOnLayer('L1_Top') Or ExistsOnLayer('L8_Bottom'))] p78: gap=0.02 ignorepadtopadclearanceinfootprint=FALSE except(0.254: Hole-Hole) sourcerule=512 cellrowname=I2S_PROTOCOL cellrowtype=2 cellcolname=EMMC_HIGH_SPEED cellcoltype=2 outerlayers=TRUE
Clearance Clearance_3 [InNetClass('I2S_PROTOCOL') vs InNetClass('EMMC_HIGH_SPEED')] p79: gap=0.254 ignorepadtopadclearanceinfootprint=FALSE sourcerule=512 cellrowname=I2S_PROTOCOL cellrowtype=2 cellcolname=EMMC_HIGH_SPEED cellcoltype=2
Clearance Clearance_1 [InNetClass('I2S_PROTOCOL') And (ExistsOnLayer('L3_Sig1') Or ExistsOnLayer('L5_Sig2') Or ExistsOnLayer('L6_Sig3') Or ExistsOnLayer('L8_Sig4')) vs InNetClass('I2S_PROTOCOL') And (ExistsOnLayer('L3_Sig1') Or ExistsOnLayer('L5_Sig2') Or ExistsOnLayer('L6_Sig3') Or ExistsOnLayer('L8_Sig4'))] p80: gap=0.02 ignorepadtopadclearanceinfootprint=FALSE except(0.254: Hole-Hole) sourcerule=512 cellrowname=I2S_PROTOCOL cellrowtype=2 cellcolname=I2S_PROTOCOL cellcoltype=2 innerlayers=TRUE
Clearance Clearance_2 [InNetClass('I2S_PROTOCOL') And (ExistsOnLayer('L1_Top') Or ExistsOnLayer('L8_Bottom')) vs InNetClass('I2S_PROTOCOL') And (ExistsOnLayer('L1_Top') Or ExistsOnLayer('L8_Bottom'))] p81: gap=0.02 ignorepadtopadclearanceinfootprint=FALSE except(0.254: Hole-Hole) sourcerule=512 cellrowname=I2S_PROTOCOL cellrowtype=2 cellcolname=I2S_PROTOCOL cellcoltype=2 outerlayers=TRUE
Clearance Clearance_3 [InNetClass('I2S_PROTOCOL') vs InNetClass('I2S_PROTOCOL')] p82: gap=0.254 ignorepadtopadclearanceinfootprint=FALSE sourcerule=512 cellrowname=I2S_PROTOCOL cellrowtype=2 cellcolname=I2S_PROTOCOL cellcoltype=2
Clearance Clearance_1 [InNetClass('MCU_SIGNAL') And (ExistsOnLayer('L3_Sig1') Or ExistsOnLayer('L5_Sig2') Or ExistsOnLayer('L6_Sig3') Or ExistsOnLayer('L8_Sig4')) vs InNetClass('ANTENAS') And (ExistsOnLayer('L3_Sig1') Or ExistsOnLayer('L5_Sig2') Or ExistsOnLayer('L6_Sig3') Or ExistsOnLayer('L8_Sig4'))] p83: gap=0.02 ignorepadtopadclearanceinfootprint=FALSE except(0.05: Hole-Hole) sourcerule=512 cellrowname=MCU_SIGNAL cellrowtype=2 cellcolname=ANTENAS cellcoltype=2 innerlayers=TRUE
Clearance Clearance_2 [InNetClass('MCU_SIGNAL') And (ExistsOnLayer('L1_Top') Or ExistsOnLayer('L8_Bottom')) vs InNetClass('ANTENAS') And (ExistsOnLayer('L1_Top') Or ExistsOnLayer('L8_Bottom'))] p84: gap=0.02 ignorepadtopadclearanceinfootprint=FALSE except(0.05: Hole-Hole) sourcerule=512 cellrowname=MCU_SIGNAL cellrowtype=2 cellcolname=ANTENAS cellcoltype=2 outerlayers=TRUE
Clearance Clearance_3 [InNetClass('MCU_SIGNAL') vs InNetClass('ANTENAS')] p85: gap=0.254 ignorepadtopadclearanceinfootprint=FALSE sourcerule=512 cellrowname=MCU_SIGNAL cellrowtype=2 cellcolname=ANTENAS cellcoltype=2
Clearance Clearance_1 [InNetClass('MCU_SIGNAL') And (ExistsOnLayer('L3_Sig1') Or ExistsOnLayer('L5_Sig2') Or ExistsOnLayer('L6_Sig3') Or ExistsOnLayer('L8_Sig4')) vs (ExistsOnLayer('L3_Sig1') Or ExistsOnLayer('L5_Sig2') Or ExistsOnLayer('L6_Sig3') Or ExistsOnLayer('L8_Sig4'))] p86: gap=0.02 ignorepadtopadclearanceinfootprint=FALSE except(0.254: Hole-Hole) sourcerule=512 cellrowname=MCU_SIGNAL cellrowtype=2 cellcolname=All cellcoltype=0 innerlayers=TRUE
Clearance Clearance_2 [InNetClass('MCU_SIGNAL') And (ExistsOnLayer('L1_Top') Or ExistsOnLayer('L8_Bottom')) vs (ExistsOnLayer('L1_Top') Or ExistsOnLayer('L8_Bottom'))] p87: gap=0.02 ignorepadtopadclearanceinfootprint=FALSE except(0.254: Hole-Hole) sourcerule=512 cellrowname=MCU_SIGNAL cellrowtype=2 cellcolname=All cellcoltype=0 outerlayers=TRUE
Clearance Clearance_3 [InNetClass('MCU_SIGNAL')] p88: gap=0.254 ignorepadtopadclearanceinfootprint=FALSE sourcerule=512 cellrowname=MCU_SIGNAL cellrowtype=2 cellcolname=All cellcoltype=0
Clearance Clearance_1 [InNetClass('MCU_SIGNAL') And (ExistsOnLayer('L3_Sig1') Or ExistsOnLayer('L5_Sig2') Or ExistsOnLayer('L6_Sig3') Or ExistsOnLayer('L8_Sig4')) vs InNetClass('CPU_SIGNAL') And (ExistsOnLayer('L3_Sig1') Or ExistsOnLayer('L5_Sig2') Or ExistsOnLayer('L6_Sig3') Or ExistsOnLayer('L8_Sig4'))] p89: gap=0.02 ignorepadtopadclearanceinfootprint=FALSE except(0.254: Hole-Hole) sourcerule=512 cellrowname=MCU_SIGNAL cellrowtype=2 cellcolname=CPU_SIGNAL cellcoltype=2 innerlayers=TRUE
Clearance Clearance_2 [InNetClass('MCU_SIGNAL') And (ExistsOnLayer('L1_Top') Or ExistsOnLayer('L8_Bottom')) vs InNetClass('CPU_SIGNAL') And (ExistsOnLayer('L1_Top') Or ExistsOnLayer('L8_Bottom'))] p90: gap=0.02 ignorepadtopadclearanceinfootprint=FALSE except(0.254: Hole-Hole) sourcerule=512 cellrowname=MCU_SIGNAL cellrowtype=2 cellcolname=CPU_SIGNAL cellcoltype=2 outerlayers=TRUE
Clearance Clearance_3 [InNetClass('MCU_SIGNAL') vs InNetClass('CPU_SIGNAL')] p91: gap=0.254 ignorepadtopadclearanceinfootprint=FALSE sourcerule=512 cellrowname=MCU_SIGNAL cellrowtype=2 cellcolname=CPU_SIGNAL cellcoltype=2
Clearance Clearance_1 [InNetClass('MCU_SIGNAL') And (ExistsOnLayer('L3_Sig1') Or ExistsOnLayer('L5_Sig2') Or ExistsOnLayer('L6_Sig3') Or ExistsOnLayer('L8_Sig4')) vs InNetClass('CSI_HIGH_SPEED') And (ExistsOnLayer('L3_Sig1') Or ExistsOnLayer('L5_Sig2') Or ExistsOnLayer('L6_Sig3') Or ExistsOnLayer('L8_Sig4'))] p92: gap=0.02 ignorepadtopadclearanceinfootprint=FALSE except(0.254: Hole-Hole) sourcerule=512 cellrowname=MCU_SIGNAL cellrowtype=2 cellcolname=CSI_HIGH_SPEED cellcoltype=2 innerlayers=TRUE
Clearance Clearance_2 [InNetClass('MCU_SIGNAL') And (ExistsOnLayer('L1_Top') Or ExistsOnLayer('L8_Bottom')) vs InNetClass('CSI_HIGH_SPEED') And (ExistsOnLayer('L1_Top') Or ExistsOnLayer('L8_Bottom'))] p93: gap=0.02 ignorepadtopadclearanceinfootprint=FALSE except(0.254: Hole-Hole) sourcerule=512 cellrowname=MCU_SIGNAL cellrowtype=2 cellcolname=CSI_HIGH_SPEED cellcoltype=2 outerlayers=TRUE
Clearance Clearance_3 [InNetClass('MCU_SIGNAL') vs InNetClass('CSI_HIGH_SPEED')] p94: gap=0.254 ignorepadtopadclearanceinfootprint=FALSE sourcerule=512 cellrowname=MCU_SIGNAL cellrowtype=2 cellcolname=CSI_HIGH_SPEED cellcoltype=2
Clearance Clearance_1 [InNetClass('MCU_SIGNAL') And (ExistsOnLayer('L3_Sig1') Or ExistsOnLayer('L5_Sig2') Or ExistsOnLayer('L6_Sig3') Or ExistsOnLayer('L8_Sig4')) vs InNetClass('DDR1_HIGH_SPEED') And (ExistsOnLayer('L3_Sig1') Or ExistsOnLayer('L5_Sig2') Or ExistsOnLayer('L6_Sig3') Or ExistsOnLayer('L8_Sig4'))] p95: gap=0.02 ignorepadtopadclearanceinfootprint=FALSE except(0.089: Hole-Hole) sourcerule=512 cellrowname=MCU_SIGNAL cellrowtype=2 cellcolname=DDR1_HIGH_SPEED cellcoltype=2 innerlayers=TRUE
Clearance Clearance_2 [InNetClass('MCU_SIGNAL') And (ExistsOnLayer('L1_Top') Or ExistsOnLayer('L8_Bottom')) vs InNetClass('DDR1_HIGH_SPEED') And (ExistsOnLayer('L1_Top') Or ExistsOnLayer('L8_Bottom'))] p96: gap=0.02 ignorepadtopadclearanceinfootprint=FALSE except(0.089: Hole-Hole) sourcerule=512 cellrowname=MCU_SIGNAL cellrowtype=2 cellcolname=DDR1_HIGH_SPEED cellcoltype=2 outerlayers=TRUE
Clearance Clearance_3 [InNetClass('MCU_SIGNAL') vs InNetClass('DDR1_HIGH_SPEED')] p97: gap=0.254 ignorepadtopadclearanceinfootprint=FALSE sourcerule=512 cellrowname=MCU_SIGNAL cellrowtype=2 cellcolname=DDR1_HIGH_SPEED cellcoltype=2
Clearance Clearance_1 [InNetClass('MCU_SIGNAL') And (ExistsOnLayer('L3_Sig1') Or ExistsOnLayer('L5_Sig2') Or ExistsOnLayer('L6_Sig3') Or ExistsOnLayer('L8_Sig4')) vs InNetClass('EMMC_HIGH_SPEED') And (ExistsOnLayer('L3_Sig1') Or ExistsOnLayer('L5_Sig2') Or ExistsOnLayer('L6_Sig3') Or ExistsOnLayer('L8_Sig4'))] p98: gap=0.02 ignorepadtopadclearanceinfootprint=FALSE except(0.254: Hole-Hole) sourcerule=512 cellrowname=MCU_SIGNAL cellrowtype=2 cellcolname=EMMC_HIGH_SPEED cellcoltype=2 innerlayers=TRUE
Clearance Clearance_2 [InNetClass('MCU_SIGNAL') And (ExistsOnLayer('L1_Top') Or ExistsOnLayer('L8_Bottom')) vs InNetClass('EMMC_HIGH_SPEED') And (ExistsOnLayer('L1_Top') Or ExistsOnLayer('L8_Bottom'))] p99: gap=0.02 ignorepadtopadclearanceinfootprint=FALSE except(0.254: Hole-Hole) sourcerule=512 cellrowname=MCU_SIGNAL cellrowtype=2 cellcolname=EMMC_HIGH_SPEED cellcoltype=2 outerlayers=TRUE
Clearance Clearance_3 [InNetClass('MCU_SIGNAL') vs InNetClass('EMMC_HIGH_SPEED')] p100: gap=0.254 ignorepadtopadclearanceinfootprint=FALSE sourcerule=512 cellrowname=MCU_SIGNAL cellrowtype=2 cellcolname=EMMC_HIGH_SPEED cellcoltype=2
Clearance Clearance_1 [InNetClass('MCU_SIGNAL') And (ExistsOnLayer('L3_Sig1') Or ExistsOnLayer('L5_Sig2') Or ExistsOnLayer('L6_Sig3') Or ExistsOnLayer('L8_Sig4')) vs InNetClass('I2S_PROTOCOL') And (ExistsOnLayer('L3_Sig1') Or ExistsOnLayer('L5_Sig2') Or ExistsOnLayer('L6_Sig3') Or ExistsOnLayer('L8_Sig4'))] p101: gap=0.02 ignorepadtopadclearanceinfootprint=FALSE except(0.254: Hole-Hole) sourcerule=512 cellrowname=MCU_SIGNAL cellrowtype=2 cellcolname=I2S_PROTOCOL cellcoltype=2 innerlayers=TRUE
Clearance Clearance_2 [InNetClass('MCU_SIGNAL') And (ExistsOnLayer('L1_Top') Or ExistsOnLayer('L8_Bottom')) vs InNetClass('I2S_PROTOCOL') And (ExistsOnLayer('L1_Top') Or ExistsOnLayer('L8_Bottom'))] p102: gap=0.02 ignorepadtopadclearanceinfootprint=FALSE except(0.254: Hole-Hole) sourcerule=512 cellrowname=MCU_SIGNAL cellrowtype=2 cellcolname=I2S_PROTOCOL cellcoltype=2 outerlayers=TRUE
Clearance Clearance_3 [InNetClass('MCU_SIGNAL') vs InNetClass('I2S_PROTOCOL')] p103: gap=0.254 ignorepadtopadclearanceinfootprint=FALSE sourcerule=512 cellrowname=MCU_SIGNAL cellrowtype=2 cellcolname=I2S_PROTOCOL cellcoltype=2
Clearance Clearance_1 [InNetClass('MCU_SIGNAL') And (ExistsOnLayer('L3_Sig1') Or ExistsOnLayer('L5_Sig2') Or ExistsOnLayer('L6_Sig3') Or ExistsOnLayer('L8_Sig4')) vs InNetClass('MCU_SIGNAL') And (ExistsOnLayer('L3_Sig1') Or ExistsOnLayer('L5_Sig2') Or ExistsOnLayer('L6_Sig3') Or ExistsOnLayer('L8_Sig4'))] p104: gap=0.02 ignorepadtopadclearanceinfootprint=FALSE except(0.254: Hole-Hole) sourcerule=512 cellrowname=MCU_SIGNAL cellrowtype=2 cellcolname=MCU_SIGNAL cellcoltype=2 innerlayers=TRUE
Clearance Clearance_2 [InNetClass('MCU_SIGNAL') And (ExistsOnLayer('L1_Top') Or ExistsOnLayer('L8_Bottom')) vs InNetClass('MCU_SIGNAL') And (ExistsOnLayer('L1_Top') Or ExistsOnLayer('L8_Bottom'))] p105: gap=0.02 ignorepadtopadclearanceinfootprint=FALSE except(0.254: Hole-Hole) sourcerule=512 cellrowname=MCU_SIGNAL cellrowtype=2 cellcolname=MCU_SIGNAL cellcoltype=2 outerlayers=TRUE
Clearance Clearance_3 [InNetClass('MCU_SIGNAL') vs InNetClass('MCU_SIGNAL')] p106: gap=0.254 ignorepadtopadclearanceinfootprint=FALSE sourcerule=512 cellrowname=MCU_SIGNAL cellrowtype=2 cellcolname=MCU_SIGNAL cellcoltype=2
Clearance Clearance_1 [InNetClass('MIPI_HIGH_SPEED') And (ExistsOnLayer('L3_Sig1') Or ExistsOnLayer('L5_Sig2') Or ExistsOnLayer('L6_Sig3') Or ExistsOnLayer('L8_Sig4')) vs InNetClass('ANTENAS') And (ExistsOnLayer('L3_Sig1') Or ExistsOnLayer('L5_Sig2') Or ExistsOnLayer('L6_Sig3') Or ExistsOnLayer('L8_Sig4'))] p107: gap=0.02 ignorepadtopadclearanceinfootprint=FALSE except(0.05: Hole-Hole) sourcerule=512 cellrowname=MIPI_HIGH_SPEED cellrowtype=2 cellcolname=ANTENAS cellcoltype=2 innerlayers=TRUE
Clearance Clearance_2 [InNetClass('MIPI_HIGH_SPEED') And (ExistsOnLayer('L1_Top') Or ExistsOnLayer('L8_Bottom')) vs InNetClass('ANTENAS') And (ExistsOnLayer('L1_Top') Or ExistsOnLayer('L8_Bottom'))] p108: gap=0.02 ignorepadtopadclearanceinfootprint=FALSE except(0.05: Hole-Hole) sourcerule=512 cellrowname=MIPI_HIGH_SPEED cellrowtype=2 cellcolname=ANTENAS cellcoltype=2 outerlayers=TRUE
Clearance Clearance_3 [InNetClass('MIPI_HIGH_SPEED') vs InNetClass('ANTENAS')] p109: gap=0.254 ignorepadtopadclearanceinfootprint=FALSE sourcerule=512 cellrowname=MIPI_HIGH_SPEED cellrowtype=2 cellcolname=ANTENAS cellcoltype=2
Clearance Clearance_1 [InNetClass('MIPI_HIGH_SPEED') And (ExistsOnLayer('L3_Sig1') Or ExistsOnLayer('L5_Sig2') Or ExistsOnLayer('L6_Sig3') Or ExistsOnLayer('L8_Sig4')) vs (ExistsOnLayer('L3_Sig1') Or ExistsOnLayer('L5_Sig2') Or ExistsOnLayer('L6_Sig3') Or ExistsOnLayer('L8_Sig4'))] p110: gap=0.02 ignorepadtopadclearanceinfootprint=FALSE except(0.254: Hole-Hole) sourcerule=512 cellrowname=MIPI_HIGH_SPEED cellrowtype=2 cellcolname=All cellcoltype=0 innerlayers=TRUE
Clearance Clearance_2 [InNetClass('MIPI_HIGH_SPEED') And (ExistsOnLayer('L1_Top') Or ExistsOnLayer('L8_Bottom')) vs (ExistsOnLayer('L1_Top') Or ExistsOnLayer('L8_Bottom'))] p111: gap=0.02 ignorepadtopadclearanceinfootprint=FALSE except(0.254: Hole-Hole) sourcerule=512 cellrowname=MIPI_HIGH_SPEED cellrowtype=2 cellcolname=All cellcoltype=0 outerlayers=TRUE
Clearance Clearance_3 [InNetClass('MIPI_HIGH_SPEED')] p112: gap=0.254 ignorepadtopadclearanceinfootprint=FALSE sourcerule=512 cellrowname=MIPI_HIGH_SPEED cellrowtype=2 cellcolname=All cellcoltype=0
Clearance Clearance_1 [InNetClass('MIPI_HIGH_SPEED') And (ExistsOnLayer('L3_Sig1') Or ExistsOnLayer('L5_Sig2') Or ExistsOnLayer('L6_Sig3') Or ExistsOnLayer('L8_Sig4')) vs InNetClass('CPU_SIGNAL') And (ExistsOnLayer('L3_Sig1') Or ExistsOnLayer('L5_Sig2') Or ExistsOnLayer('L6_Sig3') Or ExistsOnLayer('L8_Sig4'))] p113: gap=0.02 ignorepadtopadclearanceinfootprint=FALSE except(0.254: Hole-Hole) sourcerule=512 cellrowname=MIPI_HIGH_SPEED cellrowtype=2 cellcolname=CPU_SIGNAL cellcoltype=2 innerlayers=TRUE
Clearance Clearance_2 [InNetClass('MIPI_HIGH_SPEED') And (ExistsOnLayer('L1_Top') Or ExistsOnLayer('L8_Bottom')) vs InNetClass('CPU_SIGNAL') And (ExistsOnLayer('L1_Top') Or ExistsOnLayer('L8_Bottom'))] p114: gap=0.02 ignorepadtopadclearanceinfootprint=FALSE except(0.254: Hole-Hole) sourcerule=512 cellrowname=MIPI_HIGH_SPEED cellrowtype=2 cellcolname=CPU_SIGNAL cellcoltype=2 outerlayers=TRUE
Clearance Clearance_3 [InNetClass('MIPI_HIGH_SPEED') vs InNetClass('CPU_SIGNAL')] p115: gap=0.254 ignorepadtopadclearanceinfootprint=FALSE sourcerule=512 cellrowname=MIPI_HIGH_SPEED cellrowtype=2 cellcolname=CPU_SIGNAL cellcoltype=2
Clearance Clearance_1 [InNetClass('MIPI_HIGH_SPEED') And (ExistsOnLayer('L3_Sig1') Or ExistsOnLayer('L5_Sig2') Or ExistsOnLayer('L6_Sig3') Or ExistsOnLayer('L8_Sig4')) vs InNetClass('CSI_HIGH_SPEED') And (ExistsOnLayer('L3_Sig1') Or ExistsOnLayer('L5_Sig2') Or ExistsOnLayer('L6_Sig3') Or ExistsOnLayer('L8_Sig4'))] p116: gap=0.02 ignorepadtopadclearanceinfootprint=FALSE except(0.254: Hole-Hole) sourcerule=512 cellrowname=MIPI_HIGH_SPEED cellrowtype=2 cellcolname=CSI_HIGH_SPEED cellcoltype=2 innerlayers=TRUE
Clearance Clearance_2 [InNetClass('MIPI_HIGH_SPEED') And (ExistsOnLayer('L1_Top') Or ExistsOnLayer('L8_Bottom')) vs InNetClass('CSI_HIGH_SPEED') And (ExistsOnLayer('L1_Top') Or ExistsOnLayer('L8_Bottom'))] p117: gap=0.02 ignorepadtopadclearanceinfootprint=FALSE except(0.254: Hole-Hole) sourcerule=512 cellrowname=MIPI_HIGH_SPEED cellrowtype=2 cellcolname=CSI_HIGH_SPEED cellcoltype=2 outerlayers=TRUE
Clearance Clearance_3 [InNetClass('MIPI_HIGH_SPEED') vs InNetClass('CSI_HIGH_SPEED')] p118: gap=0.254 ignorepadtopadclearanceinfootprint=FALSE sourcerule=512 cellrowname=MIPI_HIGH_SPEED cellrowtype=2 cellcolname=CSI_HIGH_SPEED cellcoltype=2
Clearance Clearance_1 [InNetClass('MIPI_HIGH_SPEED') And (ExistsOnLayer('L3_Sig1') Or ExistsOnLayer('L5_Sig2') Or ExistsOnLayer('L6_Sig3') Or ExistsOnLayer('L8_Sig4')) vs InNetClass('DDR1_HIGH_SPEED') And (ExistsOnLayer('L3_Sig1') Or ExistsOnLayer('L5_Sig2') Or ExistsOnLayer('L6_Sig3') Or ExistsOnLayer('L8_Sig4'))] p119: gap=0.02 ignorepadtopadclearanceinfootprint=FALSE except(0.089: Hole-Hole) sourcerule=512 cellrowname=MIPI_HIGH_SPEED cellrowtype=2 cellcolname=DDR1_HIGH_SPEED cellcoltype=2 innerlayers=TRUE
Clearance Clearance_2 [InNetClass('MIPI_HIGH_SPEED') And (ExistsOnLayer('L1_Top') Or ExistsOnLayer('L8_Bottom')) vs InNetClass('DDR1_HIGH_SPEED') And (ExistsOnLayer('L1_Top') Or ExistsOnLayer('L8_Bottom'))] p120: gap=0.02 ignorepadtopadclearanceinfootprint=FALSE except(0.089: Hole-Hole) sourcerule=512 cellrowname=MIPI_HIGH_SPEED cellrowtype=2 cellcolname=DDR1_HIGH_SPEED cellcoltype=2 outerlayers=TRUE
Clearance Clearance_3 [InNetClass('MIPI_HIGH_SPEED') vs InNetClass('DDR1_HIGH_SPEED')] p121: gap=0.254 ignorepadtopadclearanceinfootprint=FALSE sourcerule=512 cellrowname=MIPI_HIGH_SPEED cellrowtype=2 cellcolname=DDR1_HIGH_SPEED cellcoltype=2
Clearance Clearance_1 [InNetClass('MIPI_HIGH_SPEED') And (ExistsOnLayer('L3_Sig1') Or ExistsOnLayer('L5_Sig2') Or ExistsOnLayer('L6_Sig3') Or ExistsOnLayer('L8_Sig4')) vs InNetClass('EMMC_HIGH_SPEED') And (ExistsOnLayer('L3_Sig1') Or ExistsOnLayer('L5_Sig2') Or ExistsOnLayer('L6_Sig3') Or ExistsOnLayer('L8_Sig4'))] p122: gap=0.02 ignorepadtopadclearanceinfootprint=FALSE except(0.254: Hole-Hole) sourcerule=512 cellrowname=MIPI_HIGH_SPEED cellrowtype=2 cellcolname=EMMC_HIGH_SPEED cellcoltype=2 innerlayers=TRUE
Clearance Clearance_2 [InNetClass('MIPI_HIGH_SPEED') And (ExistsOnLayer('L1_Top') Or ExistsOnLayer('L8_Bottom')) vs InNetClass('EMMC_HIGH_SPEED') And (ExistsOnLayer('L1_Top') Or ExistsOnLayer('L8_Bottom'))] p123: gap=0.02 ignorepadtopadclearanceinfootprint=FALSE except(0.254: Hole-Hole) sourcerule=512 cellrowname=MIPI_HIGH_SPEED cellrowtype=2 cellcolname=EMMC_HIGH_SPEED cellcoltype=2 outerlayers=TRUE
Clearance Clearance_3 [InNetClass('MIPI_HIGH_SPEED') vs InNetClass('EMMC_HIGH_SPEED')] p124: gap=0.254 ignorepadtopadclearanceinfootprint=FALSE sourcerule=512 cellrowname=MIPI_HIGH_SPEED cellrowtype=2 cellcolname=EMMC_HIGH_SPEED cellcoltype=2
Clearance Clearance_1 [InNetClass('MIPI_HIGH_SPEED') And (ExistsOnLayer('L3_Sig1') Or ExistsOnLayer('L5_Sig2') Or ExistsOnLayer('L6_Sig3') Or ExistsOnLayer('L8_Sig4')) vs InNetClass('I2S_PROTOCOL') And (ExistsOnLayer('L3_Sig1') Or ExistsOnLayer('L5_Sig2') Or ExistsOnLayer('L6_Sig3') Or ExistsOnLayer('L8_Sig4'))] p125: gap=0.02 ignorepadtopadclearanceinfootprint=FALSE except(0.254: Hole-Hole) sourcerule=512 cellrowname=MIPI_HIGH_SPEED cellrowtype=2 cellcolname=I2S_PROTOCOL cellcoltype=2 innerlayers=TRUE
Clearance Clearance_2 [InNetClass('MIPI_HIGH_SPEED') And (ExistsOnLayer('L1_Top') Or ExistsOnLayer('L8_Bottom')) vs InNetClass('I2S_PROTOCOL') And (ExistsOnLayer('L1_Top') Or ExistsOnLayer('L8_Bottom'))] p126: gap=0.02 ignorepadtopadclearanceinfootprint=FALSE except(0.254: Hole-Hole) sourcerule=512 cellrowname=MIPI_HIGH_SPEED cellrowtype=2 cellcolname=I2S_PROTOCOL cellcoltype=2 outerlayers=TRUE
Clearance Clearance_3 [InNetClass('MIPI_HIGH_SPEED') vs InNetClass('I2S_PROTOCOL')] p127: gap=0.254 ignorepadtopadclearanceinfootprint=FALSE sourcerule=512 cellrowname=MIPI_HIGH_SPEED cellrowtype=2 cellcolname=I2S_PROTOCOL cellcoltype=2